# Allegro board 200-128343-0000_03.brd
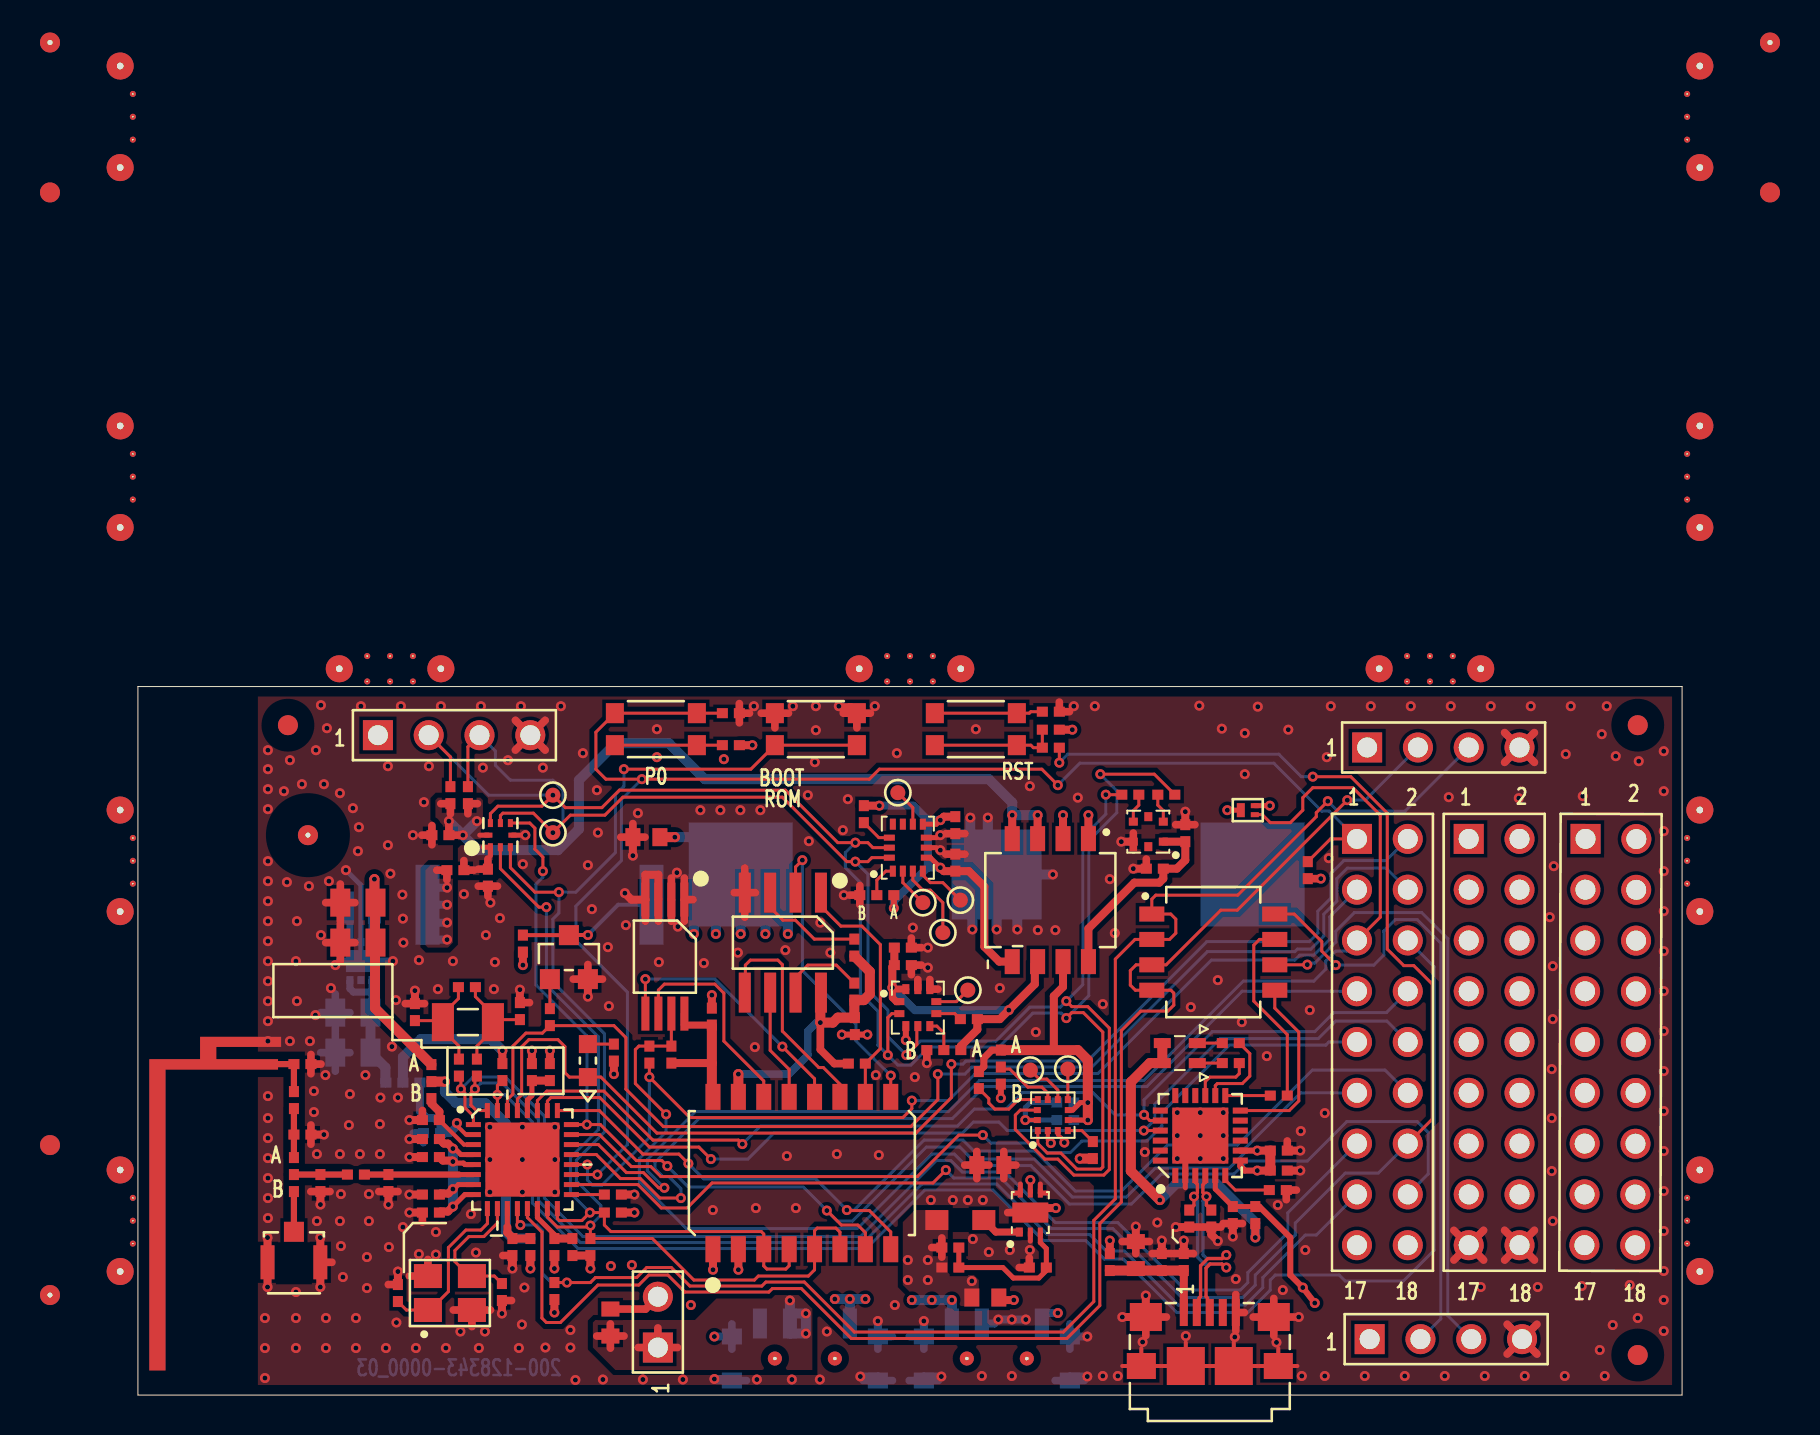
[diagram p0: board, top side]
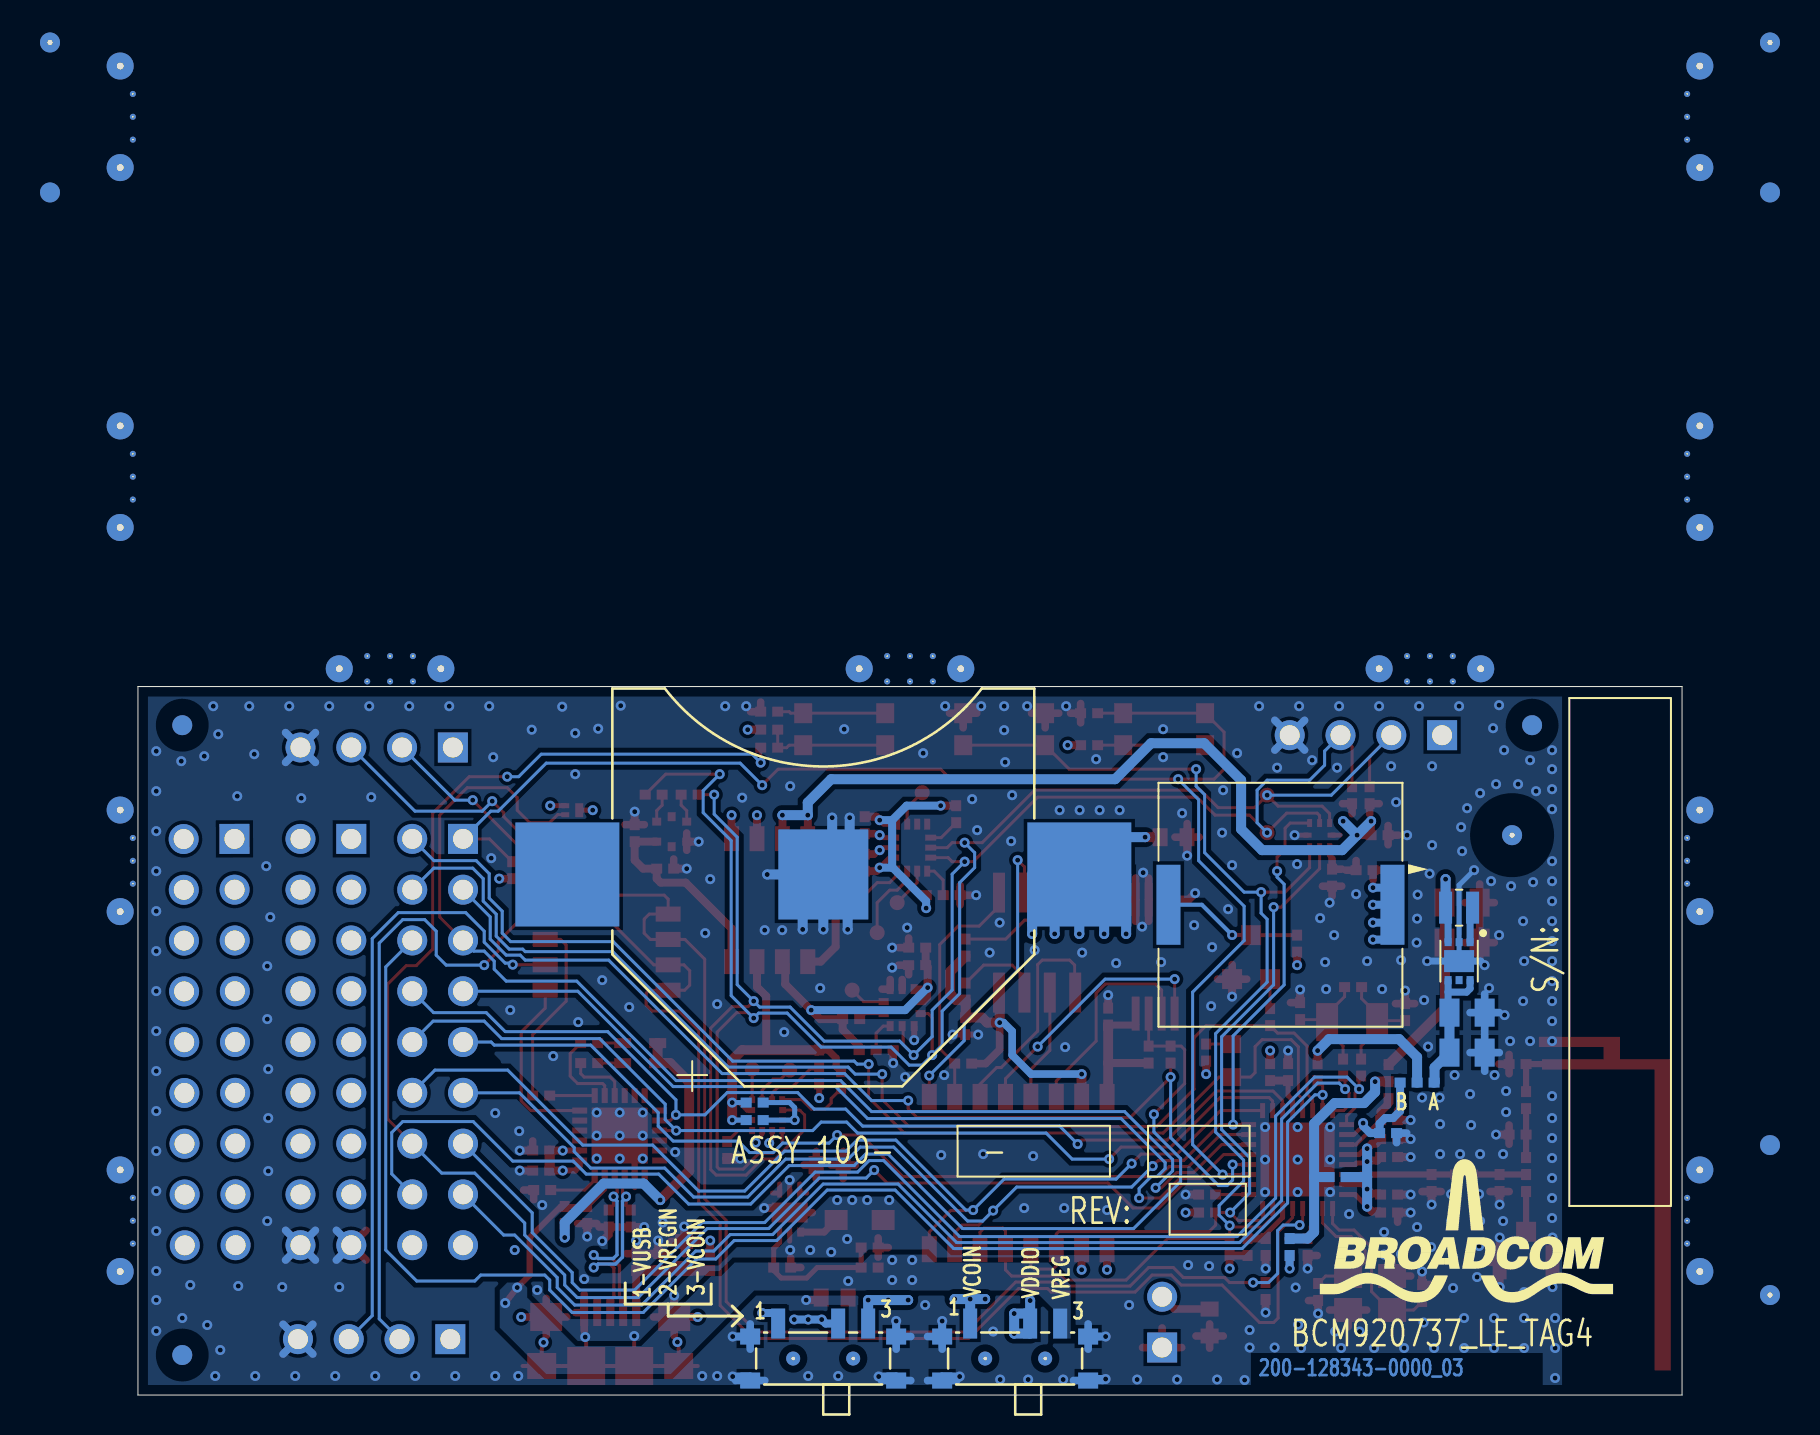
[diagram p1: board, bottom side, seen from below]

Outline 77.22 x 35.43 mm; copper layers: TOP, L02_GND, L03_PWR, BOTTOM. Coordinates in mm from the lower left corner of the outline.
Outline path: 0,35.43 0,0 77.22,0 77.22,35.43 0,35.43

## Design rules (mm)
net group DP_90_1: nets USB_DN USB_DP

## Placement (name value [footprint] x y rotation side)
A1  INV_F_ANTENNA  [TRACE]  99.88 -70.32 0 top
C1  4.7uF  [CAPC1608_IS0603Q]  25.43 27.9 180 top
C2  0.1uF  [CAPC1005_IS0402Q]  19.7 16.15 90 top
C3  0.1uF  [CAPC1005_IS0402Q]  20.82 7.4 270 top
C4  0.1uF  [CAPC1005_IS0402Q]  18.73 7.4 270 top
C5  0.1uF  [CAPC1005_IS0402Q]  28.7 18.93 90 top
C6  47uF  [CAPC2012_IS0805Q]  10.75 19.12 180 bottom
C7  47uF  [CAPC2012_IS0805Q]  11 22.62 180 top
C8  2.2uF  [CAPC1005_IS0402Q]  14.7 13.1 180 bottom
C9  1uF  [CAPC1005_IS0402Q]  14.65 13.75 180 top
C10  0.01uF  [CAPC1005_IS0402Q]  14.65 12.8 180 top
C11  10pF  [CAPC1005_IS0402Q]  14.65 11.9 180 top
C12  0.01uF  [CAPC1005_IS0402Q]  14.65 10.02 180 top
C13  0.01uF  [CAPC1005_IS0402Q]  14.65 9.12 180 top
C14  1.8pF  [CAPC1005_IS0402Q]  9.12 10.6 270 top
C15  1.8pF  [CAPC1005_IS0402Q]  12.53 10.6 270 top
C16  1.8pF (DNI)  [CAPC1005_IS0402Q]  8.22 16.55 0 top
C17  1.8pF (DNI)  [CAPC1005_IS0402Q]  8.22 13.03 0 top
C18  15pF  [CAPC1005_IS0402Q]  13 5.1 90 top
C19  15pF  [CAPC1005_IS0402Q]  18.2 5.15 270 top
C20  12pF  [CAPC1005_IS0402Q]  13.85 19.15 90 top
C21  12pF  [CAPC1005_IS0402Q]  19.1 19.2 90 top
C22  150pF  [CAPC1005_IS0402Q]  40.62 6.38 0 top
C23  4.7uF  [CAPC1608_IS0603Q]  42.62 11.5 180 top
C24  10uF  [CAPC1608_IS0603Q]  42.38 4.88 0 top
C25  10uF  [CAPC1005_IS0402Q]  57 10.25 180 top
C26  0.1uF  [CAPC1005_IS0402Q]  54.75 9 90 top
C28  4.7uF  [CAPC1608_IS0603Q]  49.9 7 90 top
C29  0.1uF  [CAPC1005_IS0402Q]  51.2 6.65 270 top
C30  22uF  [CAPC2012_IS0805Q]  10.75 17.12 180 bottom
C31  22uF  [CAPC2012_IS0805Q]  11 24.62 180 top
C34  10uF  [CAPC1005_IS0402Q]  52.38 28.1 90 top
C37  0.1uF  [CAPC1005_IS0402Q]  50.85 26.32 180 top
C54  0.1uF  [CAPC1005_IS0402Q]  57.05 12.22 180 top
C58  0.1uF  [CAPC1005_IS0402Q]  35.85 18.45 270 top
C59  0.1uF  [CAPC1005_IS0402Q]  38.25 21.5 0 top
C60  4.7uF  [CAPC1005_IS0402Q]  38.25 22.38 0 top
C61  0.1uF  [CAPC1005_IS0402Q]  40.88 26.62 90 top
C62  0.1uF  [CAPC1005_IS0402Q]  40.88 28.5 270 top
C63  0.1uF  [CAPC1005_IS0402Q]  47.75 12.25 270 top
C64  0.1uF  [CAPC1005_IS0402Q]  46.38 13.75 180 bottom
C66  1uF  [CAPC1005_IS0402Q]  46.38 14.62 180 bottom
C68  0.1uF  [CAPC1005_IS0402Q]  15.12 28 180 top
C69  0.1uF  [CAPC1005_IS0402Q]  17.5 25.88 270 top
D1  LTST-C190CKT  [LEDC1608Q]  22.5 16.73 180 top
D3  APTB1615SURKCGKC-F01  [LEDS4_KING_APTB1615Q]  52.1 17.1 180 top
D4  10V  [FUSC1005_IS0402Q]  52.3 6.65 270 top
D5  10V  [FUSC1005_IS0402Q]  53.67 8.82 90 top
D6  10V  [FUSC1005_IS0402Q]  52.58 8.82 90 top
D7  10V  [FUSC1005_IS0402Q]  57.05 11.23 0 top
FB1  120Ohms  [INDC1005_IS0402Q]  19.62 7.4 90 bottom
FB2  120Ohms  [INDC1005_IS0402Q]  17.23 10.9 180 bottom
FB3  600Ohms  [INDC1005_IS0402Q]  48.6 6.65 270 top
J1  20279-001E-04  [IPX_20279-001E-01]  7.8 6.64 270 top
J2  PBC04SAAN  [CTST254PSS4]  61.59 2.79 0 top
J7  1981568-1  [TYCO_1981568-1]  53.6 1.45 0 top
J8  PBC04SAAN  [CTST254PSS4]  61.47 32.38 0 top
J9  PBC04SAAN  [CTST254PSS4]  12 33 0 top
J10  S-M-.100-2X9  [CTST254PDS18]  60.96 27.81 270 top
J11  S-M-.100-2X9 (DNI)  [CTST254PDS18]  66.55 27.81 270 top
J12  PBC02SAAN  [CTST254PSS2]  26 2.38 90 top
J13  S-M-.100-2X9 (DNI)  [CTST254PDS18]  72.39 27.81 269.8 top
L1  10uH  [INDS2_TDK_VLS201610CXQ]  11.15 24.38 0 bottom
L2  4.7uH  [INDS2_MUR_LQM21NQ]  41.12 8.75 270 top
LS1  PKLCS1212E4001-R1  [SPKRS2_MUR_PKLCS1212Q]  20.08 24.52 0 bottom
NOREF  -  [unnamed]  64.61 35.43 180 top
NOREF#2  -  [#2]  -4.4 67.64 0 top
NOREF#3  -  [#2]  8.5 228 0 top
NOREF#4  -  [unnamed#3]  77.22 8.72 90 top
NOREF#5  -  [#2]  -9.4 72.64 0 top
NOREF#6  -  [#2]  10.75 8 0 top
NOREF#7  -  [unnamed#4]  7.5 33.5 0 top
NOREF#8  -  [unnamed#3]  0 63.93 270 top
NOREF#9  -  [unnamed]  12.61 35.43 180 top
NOREF#10  -  [unnamed#2]  -4.4 5 0 top
NOREF#11  -  [#2]  -4.4 67.64 0 top
NOREF#12  -  [#2]  -4.4 5 90 top
NOREF#13  -  [unnamed#4]  -4.4 60.14 0 top
NOREF#14  -  [#2]  -4.4 67.64 0 top
NOREF#15  -  [#2]  78.5 27 0 top
NOREF#16  -  [unnamed#4]  75 2 0 top
NOREF#17  -  [#2]  -4.4 67.64 0 top
NOREF#18  -  [#2]  101.6 96.39 0 top
NOREF#19  -  [#2]  -191.5 228 0 top
NOREF#20  -  [#2]  77.22 35.43 0 top
NOREF#21  -  [#2]  0 37.21 90 top
NOREF#22  -  [#2]  8.5 28 0 top
NOREF#23  -  [unnamed#4]  75 33.5 0 top
NOREF#24  -  [#2]  -4.4 67.64 90 top
NOREF#25  -  [unnamed]  38.61 35.43 180 top
NOREF#26  -  [unnamed#4]  -4.4 67.64 0 top
NOREF#27  -  [unnamed#2]  81.61 67.64 180 top
NOREF#28  -  [unnamed#3]  0 8.72 270 top
NOREF#29  -  [unnamed#4]  8.5 28 0 top
NOREF#30  -  [#2]  0 35.43 0 top
NOREF#31  -  [#2]  -335.28 -208.41 0 top
NOREF#32  -  [#2]  -9.4 0 90 top
NOREF#33  -  [unnamed#3]  0 45.93 270 top
NOREF#34  -  [unnamed#3]  0 26.72 270 top
NOREF#35  -  [#2]  0 0 0 top
NOREF#36  -  [unnamed#3]  77.22 63.93 90 top
NOREF#37  -  [#2]  -22.5 -25.5 0 top
NOREF#38  -  [#2]  83.82 58.29 0 top
NOREF#39  -  [unnamed#4]  81.61 60.14 180 top
NOREF#40  -  [unnamed#3]  77.22 26.72 90 top
NOREF#41  -  [#2]  8.5 28 0 top
NOREF#42  -  [#2]  0 35.43 0 top
NOREF#43  -  [#2]  65.5 37 0 top
NOREF#44  -  [#2]  363.22 -129.67 0 top
NOREF#45  -  [unnamed#3]  77.22 45.93 90 top
NOREF#46  -  [unnamed#4]  -4.4 12.5 0 top
NOREF#47  -  [#2]  0 35.43 90 top
NOREF#48  -  [unnamed#4]  -4.4 12.5 180 bottom
NOREF#49  -  [unnamed#4]  -4.4 60.14 180 bottom
NOREF#50  -  [unnamed#4]  81.61 60.14 0 bottom
NOREF#51  -  [unnamed#4]  75 33.5 180 bottom
NOREF#52  -  [#2]  363.22 -129.67 180 bottom
NOREF#53  -  [unnamed#4]  75 2 180 bottom
NOREF#54  -  [unnamed#4]  7.5 33.5 180 bottom
Q1  2SC2712-Y,LF  [SOT23_B_E_C]  21.55 21.9 0 top
Q3  PBSS3540M  [SOT883_SC-101_B_E_C]  55.5 29.25 180 top
R1  10K  [RESC1005_IS0402Q]  45.65 33.27 180 top
R2  0  [RESC1005_IS0402Q]  45.65 32.38 0 top
R3  0  [RESC1005_IS0402Q]  20.6 16.15 270 top
R4  0  [RESC1005_IS0402Q]  21.73 7.4 90 top
R5  0  [RESC1005_IS0402Q]  19.62 7.4 90 top
R6  1K  [RESC1005_IS0402Q]  45.65 34.17 0 top
R7  1K  [RESC1005_IS0402Q]  29.65 32.5 180 top
R8  10K  [RESC1005_IS0402Q]  26.68 17.02 90 top
R9  0  [RESC1005_IS0402Q]  25.57 17.02 90 top
R10  100K  [RESC1005_IS0402Q]  29.65 34.1 0 top
R11  470  [RESC1005_IS0402Q]  19.25 22.57 90 top
R12  10K (DNI)  [RESC1005_IS0402Q]  20.82 5.2 270 top
R13  0  [RESC1005_IS0402Q]  18.23 16.15 270 top
R14  5.6K  [RESC1005_IS0402Q]  20.6 18.9 270 top
R15  10K  [RESC1005_IS0402Q]  35.83 20.18 90 top
R16  10K  [RESC1005_IS0402Q]  35.83 22.38 90 top
R17  10K  [RESC1005_IS0402Q]  35.95 16.57 0 top
R18  4.7K  [RESC1005_IS0402Q]  23.75 9.12 180 top
R19  4.7K  [RESC1005_IS0402Q]  22.62 7.4 90 top
R22  200  [RESC1005_IS0402Q]  23.8 17.12 90 top
R23  10K  [RESC1005_IS0402Q]  23.75 10.02 0 top
R24  2.7nH  [INDC1005_IS0402Q]  10.9 11.02 0 top
R25  0  [RESC1005_IS0402Q]  7.8 14.75 270 top
R26  0 (DNI)  [RESC1005_IS0402Q]  16.05 16.38 90 top
R27  0 (DNI)  [RESC1005_IS0402Q]  16.95 16.38 270 top
R28  10M  [RESC1005_IS0402Q]  16.45 20.4 0 top
R29  0  [RESC1608_IS0603Q]  23.62 3.62 90 top
R30  10K  [RESC1005_IS0402Q_OPT_AB]  40.3 17.25 180 top
R31  10K  [RESC1005_IS0402Q_OPT_AB]  36.95 25 180 top
R32  10K  [RESC1005_IS0402Q_OPT_AB]  43.15 16.4 270 top
R39  0  [RESC1005_IS0402Q]  15.88 26.25 0 top
R40  4.7K  [RESC1005_IS0402Q]  15.62 30 270 top
R41  4.7K  [RESC1005_IS0402Q]  16.5 30 270 top
R50  0  [RESC1005_IS0402Q]  51.42 30.02 180 top
R51  0  [RESC1005_IS0402Q]  49.62 30.02 0 top
R59  0  [RESC1005_IS0402Q]  57.05 14.97 0 top
R60  200 (DNI)  [RESC1005_IS0402Q]  54.65 17.6 180 top
R61  200 (DNI)  [RESC1005_IS0402Q]  54.65 16.6 180 top
R62  0 (DNI)  [RESC1005_IS0402Q]  55.88 9 270 top
R63  10K  [RESC1005_IS0402Q]  41.55 18.8 0 top
R64  10K  [RESC1005_IS0402Q]  36.3 29.05 270 top
R65  10K  [RESC1005_IS0402Q]  42.05 15.75 90 top
R66  10K (DNI)  [RESC1005_IS0402Q]  58.5 26.25 90 top
RD5  0  [RESC1005_IS0402Q_OPT_AB]  14.68 15.68 270 top
RD6  0  [RESC1005_IS0402Q_OPT_AB]  13.25 15.62 0 bottom
RD7  0  [RESC1005_IS0402Q_OPT_AB]  7.8 11.02 270 top
RFB1  360K  [RESC1005_IS0402Q]  40.62 7.38 0 top
RFB2  240K  [RESC1005_IS0402Q]  45 6.38 180 top
SW1  KMR221GLFS  [SWPBS4_CK_KMR2XXG]  33.9 33.3 0 top
SW2  KMR221GLFS  [SWPBS4_CK_KMR2XXG]  25.9 33.3 0 top
SW3  KMR221GLFS  [SWPBS4_CK_KMR2XXG]  41.9 33.3 0 top
SW4  SSSS811101  [SWSLS3_ALPS_SSSS811101]  42.95 1.82 90 bottom
SW5  SSSS811101  [SWSLS3_ALPS_SSSS811101]  33.35 1.82 90 bottom
SW6  A6H-4101  [SWDPS8_OMRON_A6H-4102]  53.77 22.15 0 top
SW8  TDA08H0SB1  [SWDPS16_ITT_TDA08H0SK1]  33.2 11.1 90 top
SW9  A6H-4101  [SWDPS8_OMRON_A6H-4102]  45.62 24.75 270 top
TP5  TP-SMT-030-RND  [TP_SMD_030RD]  20.75 30 180 top
TP6  TP-SMT-030-RND  [TP_SMD_030RD]  20.75 28.12 180 top
TP7  TP-SMT-030-RND  [TP_SMD_030RD]  41.12 24.75 0 top
TP8  TP-SMT-030-RND  [TP_SMD_030RD]  38 30.12 0 top
TP9  TP-SMT-030-RND  [TP_SMD_030RD]  41.5 20.25 0 top
TP11  TP-SMT-030-RND  [TP_SMD_030RD]  39.25 24.62 0 top
TP12  TP-SMT-030-RND  [TP_SMD_030RD]  40.25 23.12 0 top
TP13  TP-SMT-030-RND  [TP_SMD_030RD]  44.62 16.25 0 top
TP14  TP-SMT-030-RND  [TP_SMD_030RD]  46.5 16.3 90 top
U1  24FC512-I/ST  [TSOP65P640_8_D300N]  26.35 21.93 270 top
U2  BCM20737A1KML2G  [QFN50P500X500_32_HS370_BCM]  19.23 11.77 0 top
U3  MX25U4033EM1I-12G  [SOIC127P600_8_D490N]  32.25 22.62 270 top
U4  XC9265B1214R-G  [SON55P200X180_6_USP-6ELQ]  11.15 21.7 270 bottom
U5  XC9236_ADJ  [SON50P200X180_6_USP-6CQ]  44.62 9.12 90 top
U6  CP2105-F01-GM  [QFN50P400X400_24_HS280N]  53.12 12.97 90 top
U8  HTS221  [MODS6_ST_HLGA-6LN]  50.52 28.18 180 top
U9  FXM2IC102  [QFN50P160X160_8_MAC08AQ]  18.12 28 90 top
U10  LPS25HBTR  [QFN60P250X250_10_ST-LGA-10LN]  39 19.38 0 top
U15  LSM6DS3  [LGA50P300X250_14_ST-LGA14N]  38.5 27.38 90 top
U16  LIS3MDLTR  [QFN50P200X200_12_ST_LGA-12Q]  45.75 14 90 top
Y1  24.000MHz  [XTALS4_3M2X2M5]  15.6 5.1 90 top
Y2  0.03277MHz  [XTALS2_ABR_ABS07Q]  16.5 18.65 0 top
ZB1  3002TR  [BATHS3_KEY_3002Q]  42.94 26.04 180 bottom

## Library data of the parts
A1 = INV_F_ANTENNA_1: Tolerance: TOLERANCE; User Part Number: PART NUMBER
C1-C26 C28-C31 C34 C37 C54 C58-C64 C66 C68 C69 = CAP: User Part Number: Part No
D1 = DIO-LED: User Part Number: Part No
D3 = LED-DUAL-RED1-GRN2: User Part Number: Part No
D4-D7 = DIO-TVS-BIPOLAR-2: User Part Number: Part No
FB1-FB3 = FB: User Part Number: Part No
J1 = RF-2GND-J: User Part Number: Part No
J2 J8 J9 = PLG-4-J: User Part Number: Part No
J7 = USB-5P-6SH-J: User Part Number: Part No
J10 J11 J13 = PLG-18-ODD-EVEN-J: Tolerance: TOLERANCE; User Part Number: PART NUMBER
J12 = HDR1X2-J: User Part Number: Part No
L1 = IND-SHIELDED-NO-DOT: User Part Number: Part No
L2 = IND: User Part Number: Part No
LS1 = SPEAKER: User Part Number: Part No
NOREF NOREF#9 NOREF#25 = -: User Part Number: MOUSEBITE_BD2BD_70MIL-3HOLE
NOREF#4 NOREF#8 NOREF#28 NOREF#33 NOREF#34 NOREF#36 NOREF#40 NOREF#45 = -: User Part Number: MOUSEBITE_BD2RAIL_70MIL-3HOLE
NOREF#10 NOREF#26 NOREF#27 NOREF#29 = -: User Part Number: MTGHOLE_D320N
Q1 = NPN: User Part Number: Part No
Q3 = PNP: User Part Number: Part No
R1-R19 R22 R23 R25-R29 R39-R41 R50 R51 R59-R66 RFB1 RFB2 = RES: User Part Number: Part No
R24 = IND-DOT-1: User Part Number: Part No
R30 R32 RD5 RD6 = RES-OPT-B-A: User Part Number: Part No
R31 RD7 = RES-OPT-A-B: User Part Number: Part No
SW1-SW3 = SWITCH-PB-13-24: User Part Number: Part No
SW4 SW5 = SWITCH-SPDT-CP2NC3NO1-4SHLD: User Part Number: Part No
SW6 SW9 = SW-DIP-4: User Part Number: Part No
SW8 = SW-DIP-8: User Part Number: Part No
TP5-TP9 TP11-TP14 = TP: User Part Number: Part No
U1 = 24XX512-DIL8: Tolerance: TOLERANCE; User Part Number: PART NUMBER
U2 = BCM20736A1KML2G-W1000-27301: User Part Number: Part No
U3 = MX25U4033E-DIL8: User Part Number: Part No
U4 = XC9265-DFN6H: User Part Number: Part No
U5 = XC9236-ADJ-DFN6H: User Part Number: Part No
U6 = USB-CP2105-QFN24H: User Part Number: Part No
U8 = HTS221-LGA6: User Part Number: Part No
U9 = VOLT-XLATOR-FXM2IC102: User Part Number: Part No
U10 = LPS25HB-LGA10: User Part Number: Part No
U15 = LSM6DS3-LGA14: User Part Number: Part No
U16 = LIS3MDL-LGA12: User Part Number: Part No
Y1 = XTAL-1G3G: User Part Number: Part No
Y2 = XTAL: User Part Number: Part No
ZB1 = BATTERY-HOLDER-P2N1: User Part Number: Part No

## Footprints (pads in the part's own frame, mm; a bottom-side part is the same pattern mirrored in y, then rotated)
BATHS3_KEY_3002Q
  rect 4.5x4.5 smd: N(0,0)
  rect 5.2x5.2 smd: P1(-12.8,0) P2(12.8,0)
CAPC1005_IS0402Q
  rect 0.55x0.5 smd: 1(-0.425,0) 2(0.425,0)
CAPC1608_IS0603Q
  rect 0.75x0.9 smd: 1(-0.675,0) 2(0.675,0)
CAPC2012_IS0805Q
  rect 1x1.4 smd: 1(-0.88,0) 2(0.88,0)
CTST254PDS18
  rect 1.5x1.5 hole 1: 1(0,0)
  round 1.5 hole 1: 2(0,2.54) 3(2.54,0) 4(2.54,2.54) 5(5.08,0) 6(5.08,2.54) 7(7.62,0) 8(7.62,2.54) 9(10.16,0) 10(10.16,2.54) 11(12.7,0) 12(12.7,2.54) 13(15.24,0) 14(15.24,2.54) 15(17.78,0) 16(17.78,2.54) 17(20.32,0) 18(20.32,2.54)
CTST254PSS2
  rect 1.5x1.5 hole 1: 1(0,0)
  round 1.5 hole 1: 2(2.54,0)
CTST254PSS4
  rect 1.5x1.5 hole 1: 1(0,0)
  round 1.5 hole 1: 2(2.54,0) 3(5.08,0) 4(7.62,0)
FUSC1005_IS0402Q
  rect 0.55x0.5 smd: 1(-0.425,0) 2(0.425,0)
INDC1005_IS0402Q
  rect 0.55x0.5 smd: 1(-0.425,0) 2(0.425,0)
INDS2_MUR_LQM21NQ
  rect 1x1.15 smd: 1(0,1.175) 2(0,-1.175)
INDS2_TDK_VLS201610CXQ
  rect 0.65x1.6 smd: 1(-0.675,0) 2(0.675,0)
IPX_20279-001E-01
  rect 1.7x0.7 smd: G1(0,1.32) G2(0,-1.32)
  rect 1x1 smd: S(-1.525,0)
LEDC1608Q
  rect 0.9x0.9 smd: A(0,-0.826) C(0,0.826)
LEDS4_KING_APTB1615Q
  rect 0.85x0.5 smd: A1(0.875,0.5) A2(0.875,-0.5) C1(-0.875,0.5) C2(-0.875,-0.5)
LGA50P300X250_14_ST-LGA14N
  rect 0.55x0.3 smd: 1(-1.175,0.75) 2(-1.175,0.25) 3(-1.175,-0.25) 4(-1.175,-0.75) 8(1.175,-0.75) 9(1.175,-0.25) 10(1.175,0.25) 11(1.175,0.75)
  rect 0.3x0.55 smd: 5(-0.5,-0.925) 6(0,-0.925) 7(0.5,-0.925) 12(0.5,0.925) 13(0,0.925) 14(-0.5,0.925)
MODS6_ST_HLGA-6LN
  rect 0.45x0.4 smd: 1(-0.75,0.5) 2(-0.75,-0.5) 4(0.75,-0.5) 5(0.75,0.5)
  rect 0.4x0.45 smd: 3(0,-0.75) 6(0,0.75)
QFN50P160X160_8_MAC08AQ
  rect 0.4x0.25 smd: 1(-0.605,0.5) 2(-0.605,0) 3(-0.605,-0.5) 5(0.605,-0.5) 6(0.605,0) 7(0.605,0.5)
  rect 0.25x0.4 smd: 4(0,-0.6) 8(0,0.6)
QFN50P200X200_12_ST_LGA-12Q
  rect 0.35x0.3 smd: 1(-0.775,0.75) 2(-0.775,0.25) 3(-0.775,-0.25) 4(-0.775,-0.75) 7(0.775,-0.75) 8(0.775,-0.25) 9(0.775,0.25) 10(0.775,0.75)
  rect 0.3x0.35 smd: 5(-0.25,-0.775) 6(0.25,-0.775) 11(0.25,0.775) 12(-0.25,0.775)
QFN50P400X400_24_HS280N
  rect 0.75x0.3 smd: 1(-2,1.25) 2(-2,0.75) 3(-2,0.25) 4(-2,-0.25) 5(-2,-0.75) 6(-2,-1.25) 13(2,-1.25) 14(2,-0.75) 15(2,-0.25) 16(2,0.25) 17(2,0.75) 18(2,1.25)
  rect 0.3x0.75 smd: 7(-1.25,-2) 8(-0.75,-2) 9(-0.25,-2) 10(0.25,-2) 11(0.75,-2) 12(1.25,-2) 19(1.25,2) 20(0.75,2) 21(0.25,2) 22(-0.25,2) 23(-0.75,2) 24(-1.25,2)
  rect 2.8x2.8 smd: H(0,0)
QFN50P500X500_32_HS370_BCM
  rect 0.75x0.25 smd: 1(-2.45,1.75) 2(-2.45,1.25) 3(-2.45,0.75) 4(-2.45,0.25) 5(-2.45,-0.25) 6(-2.45,-0.75) 7(-2.45,-1.25) 8(-2.45,-1.75) 17(2.45,-1.75) 18(2.45,-1.25) 19(2.45,-0.75) 20(2.45,-0.25) 21(2.45,0.25) 22(2.45,0.75) 23(2.45,1.25) 24(2.45,1.75)
  rect 0.25x0.75 smd: 9(-1.75,-2.45) 10(-1.25,-2.45) 11(-0.75,-2.45) 12(-0.25,-2.45) 13(0.25,-2.45) 14(0.75,-2.45) 15(1.25,-2.45) 16(1.75,-2.45) 25(1.75,2.45) 26(1.25,2.45) 27(0.75,2.45) 28(0.25,2.45) 29(-0.25,2.45) 30(-0.75,2.45) 31(-1.25,2.45) 32(-1.75,2.45)
  rect 3.7x3.7 smd: H(0,0)
QFN60P250X250_10_ST-LGA-10LN
  rect 0.5x0.35 smd: 1(-0.925,0.3) 2(-0.925,-0.3) 6(0.925,-0.3) 7(0.925,0.3)
  rect 0.35x0.5 smd: 3(-0.6,-0.925) 4(0,-0.925) 5(0.6,-0.925) 8(0.6,0.925) 9(0,0.925) 10(-0.6,0.925)
RESC1005_IS0402Q
  rect 0.55x0.5 smd: 1(-0.425,0) 2(0.425,0)
RESC1005_IS0402Q_OPT_AB
  rect 0.55x0.5 smd: A(-0.85,0) B(0.85,0) C(0,0)
RESC1608_IS0603Q
  rect 0.75x0.9 smd: 1(-0.675,0) 2(0.675,0)
SOIC127P600_8_D490N
  rect 2x0.6 smd: 1(-2.5,1.905) 2(-2.5,0.635) 3(-2.5,-0.635) 4(-2.5,-1.905) 5(2.5,-1.905) 6(2.5,-0.635) 7(2.5,0.635) 8(2.5,1.905)
SON50P200X180_6_USP-6CQ
  rect 0.45x0.35 smd: 1(-0.975,0.55)
  rect 0.45x0.25 smd: 2(-0.975,0) 3(-0.975,-0.5) 4(0.975,-0.5) 5(0.975,0) 6(0.975,0.5)
  rect 1x1.8 smd: H(0,0)
SON55P200X180_6_USP-6ELQ
  rect 0.4x0.35 smd: 1(-0.95,0.55) 2(-0.95,0) 3(-0.95,-0.55) 4(0.95,-0.55) 5(0.95,0) 6(0.95,0.55)
  rect 1.1x1.5 smd: H(0,0)
SOT23_B_E_C
  rect 1x1 smd: B(-0.95,-1.1) C(0,1.1) E(0.95,-1.1)
SOT883_SC-101_B_E_C
  rect 0.4x0.25 smd: B(-0.35,0.225) E(-0.35,-0.225)
  rect 0.4x0.7 smd: C(0.35,0)
SPKRS2_MUR_PKLCS1212Q
  rect 1.2x4 smd: 1(-5.6,0) 2(5.6,0)
SWDPS8_OMRON_A6H-4102
  rect 1.25x0.75 smd: 1(-3.075,1.905) 2(-3.075,0.635) 3(-3.075,-0.635) 4(-3.075,-1.905) 5(3.075,-1.905) 6(3.075,-0.635) 7(3.075,0.635) 8(3.075,1.905)
SWDPS16_ITT_TDA08H0SK1
  rect 1.3x0.75 smd: 1(-3.81,4.445) 2(-3.81,3.175) 3(-3.81,1.905) 4(-3.81,0.635) 5(-3.81,-0.635) 6(-3.81,-1.905) 7(-3.81,-3.175) 8(-3.81,-4.445) 9(3.81,-4.445) 10(3.81,-3.175) 11(3.81,-1.905) 12(3.81,-0.635) 13(3.81,0.635) 14(3.81,1.905) 15(3.81,3.175) 16(3.81,4.445)
SWPBS4_CK_KMR2XXG
  rect 0.9x1 smd: 1(2.05,0.8) 2(2.05,-0.8) 3(-2.05,0.8) 4(-2.05,-0.8)
SWSLS3_ALPS_SSSS811101
  custom 0.7x0.175 hole 0.9 unplated: (0,-1.5) (0,1.5)
  rect 1.5x0.7 smd: 1(1.75,2.25) 2(1.75,-0.75) 3(1.75,-2.25)
  rect 0.8x1 smd: SH1(1.1,3.65) SH2(1.1,-3.65) SH3(-1.1,3.65) SH4(-1.1,-3.65)
TP_SMD_030RD
  round 0.75 smd: 1(0,0)
TRACE
  round 0.25 smd: 1(-93.091,86.868) 2(-92.091,86.868)
TSOP65P640_8_D300N
  rect 1.7x0.4 smd: 1(-2.85,0.975) 2(-2.85,0.325) 3(-2.85,-0.325) 4(-2.85,-0.975) 5(2.85,-0.975) 6(2.85,-0.325) 7(2.85,0.325) 8(2.85,0.975)
TYCO_1981568-1
  rect 0.4x1.35 smd: 1(-1.3,2.675) 2(-0.65,2.675) 3(0,2.675) 4(0.65,2.675) 5(1.3,2.675)
  rect 1.6x1.4 smd: SH1(-3.2,2.45) SH2(3.2,2.45)
  rect 1.45x1.3 smd: SH3(-3.425,0) SH4(3.425,0)
  rect 1.9x1.9 smd: SH5(-1.2,0) SH6(1.2,0)
unnamed
  custom 1.35x0.337 hole 1.8 unplated: (-2.54,-0.889) (2.54,-0.889)
  custom 0.3x0.075 hole 0.5 unplated: (-1.143,-0.254) (-1.143,-1.524) (0,-0.254) (0,-1.524) (1.143,-0.254) (1.143,-1.524)
unnamed#3
  custom 1.35x0.337 hole 1.8 unplated: (-2.54,-0.889) (2.54,-0.889)
  custom 0.3x0.075 hole 0.5 unplated: (-1.143,-0.254) (0,-0.254) (1.143,-0.254)
unnamed#4
  round 1 smd: (0,0)
unnamed#2
  custom 1x0.25 hole 3.2 unplated: (0,0)
XTALS2_ABR_ABS07Q
  rect 1.1x1.9 smd: 1(-1.25,0) 2(1.25,0)
XTALS4_3M2X2M5
  rect 1.2x1.4 smd: 1(-0.85,1.1) 2(-0.85,-1.1) 3(0.85,-1.1) 4(0.85,1.1)

## Nets
5V_USB: C54.2 D7.1 FB3.1 J10.17 J10.18 SW4.1(NO) U6.7(REGIN) U6.8(VBUS)
GND: A1.1(FEED) A1.2(GND) C1.2 C2.2 C3.2 C4.2 C5.2 C6.2 C7.2 C8.2 C9.2 C10.2 C11.2 C12.2 C13.2 C14.2 C15.2 C16.1 C16.2 C17.2 C18.2 C19.2 C20.2 C21.2 C23.2 C24.2 C25.1 C26.1 C28.2 C29.1 C30.2 C31.2 C34.2 C37.2 C54.1 C58.2 C59.2 C60.2 C61.2 C62.2 C63.2 C64.2 C66.2 C68.2 C69.2 D4.1 D5.1 D6.1 D7.2 J1.G1(GND#G1) J1.G2(GND#G2) J2.4(N4) J7.5(GND) J7.SH1(SHIELD#SH1) J7.SH2(SHIELD#SH2) J7.SH3(SHIELD#SH3) J7.SH4(SHIELD#SH4) J7.SH5(SHIELD#SH5) J7.SH6(SHIELD#SH6) J8.4(N4) J9.4(N4) J11.17 J11.18 Q1.E R6.2 R10.2 R12.2 R23.2 R25.1 R30.B R31.B R32.B RFB2.2 SW1.1 SW1.3 SW4.SH1(MTG1) SW4.SH2(MTG2) SW4.SH3(MTG3) SW4.SH4(MTG4) SW5.SH1(MTG1) SW5.SH2(MTG2) SW5.SH3(MTG3) SW5.SH4(MTG4) U1.1(A0) U1.2(A1) U1.3(A2) U1.4(GND) U2.H(VSS) U3.4(GND) U4.2(GND) U4.H(HS-GND) U5.2(VSS#2) U5.5(VSS#5) U5.H(HS-VSS) U6.2(GND) U6.H(HS-GND) U8.5(GND) U9.4(GND) U10.3(RESVD_GND) U10.8(GND#8) U10.9(GND#9) U15.6(GND1) U15.7(GND2) U16.2(RESVD_GND#2) U16.3(GND) U16.12(RESVD_GND#12) Y1.2(GND#2) Y1.4(GND#4) ZB1.N
VDD_COMBO: C61.1 C62.1 R31.A R64.1 SW9.5(B4) U15.5(VDD_IO) U15.8(VDD)
VDD_HT: C34.1 C37.1 SW9.8(B1) U8.1(VDD)
VDD_MAG: C64.1 C66.1 R32.A R65.2 SW9.7(B2) U16.5(VDD) U16.6(VDD_IO)
VDD_PR: C59.1 C60.1 R30.A R63.2 SW9.6(B3) U10.1(VDD_IO) U10.10(VDD)
VDD_SENS: C68.1 Q3.C R40.2 R41.2 SW9.1(A1) SW9.2(A2) SW9.3(A3) SW9.4(A4) U9.8(VCCB)
VDDI2C: C69.1 R39.2 U9.1(VCCA)
VDDIO: J2.1(N1) J8.1(N1) J9.1(N1) J11.1 J11.2 J12.2 LS1.1 Q3.E R1.1 R3.1 R4.1 R7.1 R11.1 R13.1 R18.1 R19.1 R22.1 R29.2 R39.1 R66.1 RD6.C SW8.1(A1) SW8.2(A2)
VDDIO_EE: C5.1 R8.1 SW8.16(B1) U1.8(VCC)
VDDIO_SF: C58.1 R15.1 R16.1 R17.1 SW8.15(B2) U3.8(VCC)
1P2VC: FB1.1 R5.1
1P2VRF: C10.1 C11.1 C12.1 C13.1 FB2.2 U2.4(VDDIF) U2.5(VDDFE) U2.7(VDDVCO) U2.8(VDDPLL)
BCM_RX: J8.3(N3) R12.1 SW6.1(A1) SW6.2(A2) U2.12(UART_RXD)
BCM_TX: J8.2(N2) SW6.3(A3) SW6.4(A4) U2.13(UART_TXD)
CE: R17.2 SW8.10(B7) U3.1(CS_L)
EXT_LDO_IN: C6.1 C30.1 RD6.A U4.4(CE) U4.6(VIN)
LDOEXT: C7.1 C31.1 L1.2 RD5.A U4.3(VOUT)
LDOINT: C9.1 RD5.B U2.3(LDOOUT)
MISO: SW8.9(B8) U3.2(SO/SIO1)
P0: J10.1 R10.1 R66.2 SW2.1 SW2.3 U2.19(P0)
P1: J10.3 R9.1 U2.20(P1)
P2: J10.5 Q3.B U2.22(P2)
P3: J10.7 U2.21(P3)
P4: J10.9 U2.23(P4)
P8/P33: J10.11 SW8.7(A7) U2.24(P8/P33) U9.5(OE)
P11/P27: J10.13 R26.1 U2.1(XTALI32K/P11/P27)
P12/P26: J10.15 R27.2 U2.32(XTALO32K/P12/P26)
P13/P28: D1.C(CATHODE) J10.2 U2.29(P13/P28)
P14/P38: J10.4 R14.2 U2.30(P14/P38)
P15: J10.6 R13.2 U2.31(P15)
P24: J10.8 U2.27(P24) U6.20(RXD_SCI)
P25: J10.10 U2.26(P25) U6.21(TXD_SCI)
P32: J10.12 SW8.8(A8) U2.25(P32)
REG_IN: C23.1 SW4.2(COM) U5.4(CE/MODE) U5.6(VIN)
RESET_N: J10.14 R2.2 U2.18(RESET_L)
SCK: SW8.13(B4) U3.6(SCLK)
SCL: J9.2(N2) R40.1 R50.1 TP5.1(TP) U9.7(B0) U10.2(SCL/SPC) U15.13(SCL) U16.1(SCL/SPC)
SCL_EE: SW8.14(B3) U1.6(SCL)
SCL_SCK: R18.2 SW8.3(A3) SW8.4(A4) U2.16(SCL) U9.2(A0)
SDA: J9.3(N3) R41.1 R51.1 TP6.1(TP) U9.6(B1) U10.4(SDA/SDI/SDO) U15.14(SDA) U16.11(SDA/SDI/SDO)
SDA_EE: SW8.12(B5) U1.5(SDA)
SDA_SI: R19.2 SW1.2 SW1.4 SW8.5(A5) SW8.6(A6) U2.15(SDA) U9.3(A1)
SI: SW8.11(B6) U3.5(SI/SIO0)
SWDCK: J2.3(N3) SW6.6(B3)
SWDIO: J2.2(N2) SW6.8(B1)
UP_RX: R59.2 SW6.7(B2)
UP_TX: SW6.5(B4) U6.12(RXD_ECI)
USB_DN: D5.2 J7.2(DM) U6.4(D_N)
USB_DP: D6.2 J7.3(DP) U6.3(D_P)
VCOIN: C1.1 SW4.3(NC) SW5.1(NO) ZB1.P2
VREG: C22.1 C24.1 C26.2 L2.2 R62.1 RFB1.1 SW5.3(NC) U6.5(VIO)
WP: J10.16 R8.2 R9.2 U1.7(WP)
N17010314: C19.1 U2.10(XTALO) Y1.3
N17010533: C14.1 R24.1 RD7.C
N17010535: C15.1 R24.2 U2.6(RF)
N17396120: C18.1 U2.9(XTALI) Y1.1
N17594109: C8.1 RD6.B U2.2(LDOIN)
N17687697: C17.1 R25.2 RD7.A
N17807795: LS1.2 Q1.C R11.2
N17819688: C20.1 R26.2 R28.1 Y2.1
N17819692: C21.1 R27.1 R28.2 Y2.2
N17856759: C2.1 R3.2 U2.28(VDDO)
N17856781: C3.1 R4.2 U2.14(VDDM)
N17856809: C4.1 R5.2 U2.11(VDDC)
N17857031: R7.2 SW2.2 SW2.4
N17857033: R23.1 U2.17(TMC)
N17866760: R1.2 R2.1 SW3.2 SW3.4
N17873060: FB1.2 FB2.1 RD5.C
N17920960: C22.2 RFB1.2 RFB2.1 U5.3(FB)
N17920962: L2.1 U5.1(LX)
N17955658: J1.S(RF_IN) RD7.B
N18004658: C28.1 C29.2 D4.2 FB3.2 J7.1(VBUS)
N18008391: R6.1 SW3.1 SW3.3
N18014200: J12.1 R29.1 SW5.2(COM)
N18034018: R50.2 U8.2(SCL)
N18034022: R51.2 U8.4(SDA)
N18058355: R60.1 U6.14(GPIO1_ECI_L/DSR_ECI)
N18058357: D3.C1(RED_CATHODE) R61.2
N18058361: D3.C2(GREEN_CATHODE) R60.2
N18058402: C25.2 U6.6(VDD)
N18058453: R59.1 U6.13(TXD_ECI)
N18058528: D3.A1(RED_ANODE) D3.A2(GREEN_ANODE) R62.2
N18058566: R61.1 U6.15(GPIO0_ECI_L/DTR_ECI)
N18071408: R16.2 U3.3(WP_L/SIO2)
N18071410: R15.2 U3.7(HOLD_L/SIO3)
N18076364: TP9.1(TP) U10.7(INT/DRDY)
N18076477: R63.1 U10.6(CS)
N18078153: R64.2 U15.12(CS)
N18078806: R65.1 U16.10(CS)
N18078950: TP13.1(TP) U16.8(DRDY)
N18078953: TP14.1(TP) U16.7(INT)
N18079098: C63.1 U16.4(C1)
N18105849: R30.C U10.5(SDO/SA0)
N18106184: R31.C U15.1(SDO/SA0)
N18107149: R32.C U16.9(SDO/SA1)
N178073830: Q1.B R14.1
N178074131: D1.A(ANODE) R22.2
N180008151: L1.1 U4.1(LX)
N180751066: TP7.1(TP) U15.4(INT1)
N180751067: TP12.1(TP) U15.3(SCX)
N180751068: TP11.1(TP) U15.2(SDX)
N180751069: TP8.1(TP) U15.9(INT2)

Pads without a net: J7 4; J11 3 4 5 6 7 8 9 10 11 12 13 14 15 16; J13 1 2 3 4 5 6 7 8 9 10 11 12 13 14 15 16 17 18; U4 5; U6 1 9 10 11 16 17 18 19 22 23 24; U8 3 6; U15 10 11; ZB1 P1

## Via types
v1: diameter 0.5, hole 0.25, TOP to BOTTOM, 510 vias

## Routing (per net, layer and track width the routed paths; a pad name or vN(x,y) marks a point on that pad's centre or on a via; arc(x,y) is an arc through that point)
5V_USB: length 14.8
  TOP w0.3: U6.7 55.12,11.45 55.35,11.23 v1(55.98,11.23) ; U6.8 v1(55.98,12.22)
  TOP w0.4: C54.2 v1(55.98,12.22) ; D7.1 v1(55.98,11.23) ; FB3.1 v1(48.6,7.73)
  TOP w0.5: D7.1 C54.2
  L03_PWR w0.381: 62.76,6.75 J10.18 ; J10.18 62.76,8.24 ; J10.18 64.24,6.75 ; J10.18 64.24,8.24 ; J10.17 61.7,8.24 ; J10.17 61.7,6.75 ; J10.17 60.22,6.75 ; J10.17 60.22,8.24
  BOTTOM w0.4: SW4.1 45.2,4.1 v1(46,4.1)
GND: length 252
  TOP w0.2: J7.SH5 52.4,2.63 ; J7.SH5 51.22,1.45 ; J7.SH5 53.58,1.45 ; J7.SH3 50.17,2.33 ; J7.SH3 51.13,1.45 ; J7.SH3 49.22,1.45 ; J7.SH6 55.98,1.45 ; J7.SH6 54.8,2.63 ; J7.SH6 53.62,1.45 ; J7.SH4 57.98,1.45 ; J7.SH4 56.07,1.45 ; J7.SH4 57.02,2.33 ; v1(46.33,12.62) 46.33,12.7 46,13.03 U16.3 ; U16.2 45.5,12.75 v1(45.65,12.6) ; U16.12 v1(44.38,13.75)
  TOP w0.25: U5.5 v1(44.62,10.75) ; 44.62,7.69 U5.2 ; 39.42,27.38 39.93,27.38 ; 52.38,10.37 U6.2 ; U9.4 19.16,28 ; 39.42,27.88 39.93,27.88
  TOP w0.3: v1(35.2,18.02) C58.2 v1(36.48,18.02) ; v1(38.4,17.75) U10.3 ; U6.2 52.38,11.82 v1(51.98,11.82) ; R32.B v1(43.15,14.85)
  TOP w0.31: A1.1 A1.2 C16.1 R25.1
  TOP w0.381: C1.2 25.36,27.9 ; C1.2 24.75,28.58 ; C1.2 24.14,27.9 ; 14.33,19.57 C20.2 13.37,19.57 ; 57.48,12.22 57.48,12.71 ; 17.02,25.45 C69.2 ; C69.2 17.98,25.45 ; C69.2 17.5,24.94 ; J8.4 69.83,33.13 ; J8.4 68.34,31.64 ; J8.4 69.83,31.64 ; J8.4 68.34,33.13 ; 39.18,22.38 C60.2 38.67,22.86 ; 27.32,24.77 27.32,25.86 ; 27.32,24.77 27.32,23.69 ; 27.32,24.77 27.76,24.77 ; 56.8,2.97 J7.SH2 ; J7.SH2 57.83,3.9 ; J7.SH2 56.8,4.83 ; J7.SH2 55.77,3.9 ; 30.07,33.62 R10.2 ; R10.2 30.58,34.1 ; R10.2 30.07,34.58 ; 39.6,20.78 U10.8 40.01,20.3 ; 68.34,6.75 J11.18 ; J11.18 69.83,6.75 ; J11.18 68.34,8.24 ; J11.18 69.83,8.24 ; 53.19,8.4 D5.1 54.16,8.4 ; C16.2 8.65,17.03 ; C16.2 8.65,16.07 ; C16.2 9.16,16.55 ; C31.2 10.85,24.62 ; C31.2 9.39,24.62 ; C31.2 10.12,23.69 ; C31.2 10.12,25.56 ; 40.39,27.05 C61.2 41.36,27.05 ; 51.89,28.52 C34.2 52.86,28.52 ; 13.57,5.95 Y1.4 14.5,6.78 ; 51.68,7.07 C29.1 50.72,7.07 ; 8.65,12.54 C17.2 8.65,13.51 ; 54.27,8.57 C26.1 55.23,8.57 ; 14.22,13.75 14.22,14.23 ; 14.7,27.52 C68.2 ; C68.2 14.19,28 ; C68.2 14.7,28.48 ; J9.4 20.36,32.26 ; J9.4 18.88,32.26 ; J9.4 20.36,33.74 ; J9.4 18.88,33.74 ; 26.02,23.69 26.02,24.77 ; 9.61,10.18 C14.2 8.64,10.18 ; 35.27,34.1 SW1.1 ; SW1.1 36.63,34.1 ; SW1.1 35.95,33.37 ; U3.4 30.88,25.12 ; U3.4 29.81,25.12 ; U3.4 30.34,26.36 ; U3.4 30.34,23.89 ; 65.8,8.24 J11.17 ; J11.17 67.29,6.75 ; J11.17 65.8,6.75 ; J11.17 67.29,8.24 ; C23.2 41.95,12.18 ; C23.2 41.95,10.82 ; C23.2 42.56,11.5 ; C23.2 41.34,11.5 ; C21.2 19.58,19.62 ; 49.9,7.07 C28.2 ; C28.2 49.22,7.68 ; C28.2 50.58,7.68 ; 51.82,7.07 D4.1 52.78,7.07 ; 10.12,21.69 C7.2 ; C7.2 10.12,23.56 ; C7.2 9.39,22.62 ; C7.2 10.85,22.62 ; J7.5 55.33,4.12 ; J7.5 54.9,5.03 ; J7.5 54.9,3.22 ; J1.G1 9.7,6.64 ; 40.39,28.07 C62.2 41.36,28.07 ; 46.08,34.66 46.08,34.17 46.58,34.17 ; 31.17,34.1 SW1.3 ; SW1.3 32.53,34.1 ; SW1.3 31.85,33.37 ; 12.52,5.52 13,5.52 ; Q1.E 23.23,20.8 ; Q1.E 22.5,21.53 ; Q1.E 21.77,20.8 ; 51.43,3.9 J7.SH1 50.4,2.97 ; 38.67,21.02 C59.2 39.18,21.5 ; 18.24,6.98 18.73,6.98 ; 15.77,4.25 Y1.2 ; Y1.2 16.7,3.42 ; Y1.2 17.63,4.25 ; 12.04,10.18 C15.2 13.01,10.18 ; 50.42,26.32 50.42,26.81 ; 49.77,27.24 U8.5 49.77,28.11 ; 35.59,25 R31.B ; R31.B 36.1,25.48 ; R31.B 36.1,24.52 ; C19.2 18.68,4.73 ; 57.42,9.77 C25.1 57.93,10.25 ; 68.47,3.54 69.22,2.79 ; 69.22,2.79 69.96,3.54 ; 69.22,2.79 69.96,2.05 ; 69.22,2.79 68.47,2.05 ; 25.38,23.69 U1.4 ; 39.45,16.77 R30.B ; D6.1 53.06,8.4 ; 26.68,25.86 U1.2 26.68,23.69 ; 44.07,6.38 RFB2.2 44.58,6.86 ; U10.9 39,20.78 ; 43.49,9.12 U5.H ; 14.22,8.64 14.22,9.12
  TOP w0.4: Q1.E v1(22.5,19.93) ; C24.2 43.17,4.75 v1(43.8,4.75) ; v1(6.48,5.4) J1.G2 v1(6.48,7.88) ; C21.2 v1(19.1,20.27) ; 20.82,6.98 v1(20.82,6.32) ; C1.2 v1(24.75,26.98) ; C20.2 v1(13.85,20.23) ; v1(35.05,34.45) 35.1,34.4 35.65,34.4 SW1.1 ; C29.1 v1(51.2,7.73) ; v1(49.23,3.9) J7.SH1 v1(50.4,4.98) ; v1(45.9,9.35) 44.85,9.35 U5.H ; C15.2 v1(12.53,9.52) ; v1(9.12,5.4) J1.G1 v1(9.12,7.88) ; U8.5 v1(49.17,27.68) ; 57.48,11.23 v1(58.12,11.23) ; 14.22,13.75 v1(13.57,13.75) ; D5.1 53.67,8.02 v1(54,7.7) ; C17.2 v1(9.3,13.03) ; C2.2 v1(19.7,17.23) ; D4.1 v1(52.3,7.73) ; 50.42,26.32 v1(49.77,26.32) ; C14.2 v1(9.12,9.52) ; C19.2 v1(18.2,4.07) ; 14.22,9.12 v1(13.57,9.12) ; 14.22,10.02 v1(13.57,10.02) ; C34.2 v1(52.38,29.18) ; 57.48,12.22 v1(58.12,12.22) ; C26.1 v1(54.75,7.93) ; 14.22,12.8 v1(13.57,12.8) ; R12.2 v1(20.82,4.12) ; R23.2 v1(24.82,10.02) ; 26.02,24.77 26.02,26.02 25.38,26.02 U1.4 24.68,24.77 v1(24.35,25.1) ; 13,5.52 v1(13,6.18) ; C28.2 v1(49.9,8.43) ; 14.22,11.9 v1(13.57,11.9) ; D6.1 v1(51.9,8.4) ; C5.2 v1(28.7,20)
  TOP w0.45: 18.73,6.98 v1(18.73,6.32)
  TOP w0.5: v1(47.1,11.82) C63.2
  L02_GND w0.381: 65.8,8.24 J11.17 ; J11.17 67.29,8.24 ; J11.17 67.29,6.75 ; J11.17 65.8,6.75 ; 68.47,3.54 69.22,2.79 ; 69.22,2.79 69.96,3.54 ; 69.22,2.79 69.96,2.05 ; 69.22,2.79 68.47,2.05 ; 18.88,32.26 J9.4 ; J9.4 20.36,32.26 ; J9.4 18.88,33.74 ; J9.4 20.36,33.74 ; J8.4 69.83,31.64 ; J8.4 68.34,33.13 ; J8.4 68.34,31.64 ; J8.4 69.83,33.13 ; 68.34,6.75 J11.18 ; J11.18 69.83,6.75 ; J11.18 68.34,8.24 ; J11.18 69.83,8.24
  BOTTOM w0.25: C66.2 44.62,14.62 44.38,14.38 v1(44.38,13.75) C64.2 ; U4.H U4.2 11.15,25.5 v1(10.4,26.25)
  BOTTOM w0.35: v1(9.88,21.5) 10.07,21.7 U4.H v1(12.75,21.7)
  BOTTOM w0.381: 68.34,31.64 J8.4 ; J8.4 69.83,33.13 ; J8.4 69.83,31.64 ; J8.4 68.34,33.13 ; 9.87,16.19 C30.2 ; C30.2 9.87,18.06 ; C30.2 10.6,17.12 ; C30.2 9.14,17.12 ; 37.73,2.93 SW5.SH1 37,2.29 ; 40.03,0.73 SW4.SH4 38.57,0.73 ; J11.18 69.83,6.75 ; J11.18 68.34,6.75 ; J11.18 68.34,8.24 ; J11.18 69.83,8.24 ; 36.27,0.73 SW5.SH3 37.73,0.73 ; 69.22,2.79 69.96,2.05 ; 69.22,2.79 68.47,2.05 ; 69.22,2.79 69.96,3.54 ; 69.22,2.79 68.47,3.54 ; 29.7,2.29 SW5.SH2 29.7,3.56 ; 18.88,32.26 J9.4 ; J9.4 20.36,33.74 ; J9.4 18.88,33.74 ; J9.4 20.36,32.26 ; 13.77,13.1 C8.2 14.28,12.62 ; 38.57,2.93 SW4.SH2 39.3,2.29 ; 28.97,0.73 SW5.SH4 30.43,0.73 ; 46.6,3.56 SW4.SH1 46.6,2.29 ; 9.14,19.12 C6.2 ; C6.2 9.87,18.19 ; C6.2 10.6,19.12 ; C6.2 9.87,20.06 ; 67.29,8.24 J11.17 67.29,6.75 ; 47.33,0.73 SW4.SH3 45.87,0.73
  BOTTOM w0.4: v1(40.17,0.93) 39.3,0.93 SW4.SH4 ; v1(36.12,0.93) 37,0.93 SW5.SH3 ; v1(47.48,0.93) 46.6,0.93 SW4.SH3 ; SW5.SH1 v1(37,3.7) ; v1(28.82,0.8) 29.7,0.8 SW5.SH4 ; SW5.SH2 v1(28.82,2.93) ; SW4.SH1 v1(47.48,2.93) ; SW4.SH2 v1(39.3,3.7)
  BOTTOM w0.5: ZB1.N 41.62,27.35 v1(41.62,28.88) ; ZB1.N v1(42.94,23.29) ; ZB1.N 43,26.09 43,27.25 42.5,27.75 v1(42.5,28.88) ; ZB1.N 43.98,26.04 ; ZB1.N 41.73,26.04 v1(41.73,23.29) ; v1(43.98,23.29) 43.98,26.04 ; 43.98,26.04 43.98,26.03 v1(45.75,26.03)
  vias: v1(6.35,3.85) v1(6.35,2.35) v1(6.35,0.85) v1(6.5,32.25) v1(6.5,31.3) v1(6.5,30.3) v1(6.5,29.3) v1(6.5,26.7) v1(6.5,25.7) v1(6.5,24.7) v1(6.5,23.7) v1(6.5,22.7) v1(6.5,21.7) v1(6.5,20.7) v1(6.5,19.7) v1(6.5,18.7) v1(6.5,17.7) v1(6.5,14.95) v1(6.5,13.85) v1(6.5,12.85) v1(6.5,11.85) v1(6.5,10.85) v1(6.5,9.85) v1(6.5,8.85) v1(7.3,30.2) v1(7.45,25.65) v1(7.6,31.75) v1(7.6,17.7) v1(7.95,23.7) v1(7.9,21.7) v1(7.95,19.7) v1(7.9,5.15) v1(7.9,3.85) v1(7.9,2.35) v1(8.2,30.55) v1(8.55,25.45) v1(8.6,17.7) v1(8.8,15.2) v1(8.8,14.15) v1(8.9,32.25) v1(8.88,19) v1(8.95,12.05) v1(8.95,8.7) v1(9.15,34.5) v1(9.15,23) v1(9.3,30.55) v1(9.45,33.35) v1(9.38,16) v1(9.4,3.85) v1(9.4,2.35) v1(9.55,25.7) v1(9.65,20.35) v1(10.1,30.1) v1(10.1,12.05) v1(10.15,10.05) v1(10.1,8.7) v1(10.15,7.45) v1(10.25,5.9) v1(10.55,13.5) v1(10.6,15.05) v1(10.75,29.35) v1(10.9,3.85) v1(10.9,2.35) v1(11.05,28.4) v1(11,27.2) v1(11.15,34.45) v1(11.1,12.05) v1(11.38,16) v1(11.55,10.05) v1(11.55,8.7) v1(11.45,6.9) v1(11.45,5.35) v1(12.12,14.88) v1(12.1,13.55) v1(12.1,12.05) v1(12.4,2.35) v1(12.5,31.45) v1(12.5,27.5) v1(12.55,7.4) v1(12.62,26.07) v1(12.7,17.43) v1(12.9,19.75) v1(12.93,3.62) v1(13,14.88) v1(13.15,34.45) v1(13.22,25.02) v1(13.25,23.82) v1(13.28,22.62) v1(13.25,8.4) v1(13.75,28) v1(13.9,2.35) v1(14.05,21.75) v1(14.05,7.05) v1(14.3,29.65) v1(14.55,31.45) v1(14.9,8.15) v1(14.9,7.02) v1(15,20.3) v1(15.15,34.45) v1(15.4,2.35) v1(15.75,21.7) v1(16.12,3.18) v1(16.3,25.05) v1(16.65,9.05) v1(16.9,7.12) v1(17.05,2.35) v1(17.15,34.45) v1(17.25,31.38) v1(17.35,3.18) v1(17.4,23) v1(17.62,24.62) v1(17.6,13.4) v1(17.6,11.77) v1(17.6,10.15) v1(17.85,21.65) v1(17.8,20.3) v1(18.1,23.85) v1(18.5,31.75) v1(19.05,2.35) v1(19.15,34.45) v1(19.23,13.4) v1(19.23,11.77) v1(19.23,10.15) v1(19.2,3.52) v1(19.25,26.55) v1(19.32,5.38) v1(19.38,28) v1(20.25,31.38) v1(20.38,2.38) v1(20.85,13.4) v1(20.85,11.77) v1(20.85,10.15) v1(21.15,34.45) v1(21.62,3.25) v1(21.62,2.38) v1(21.88,0.75) v1(22.25,32.1) v1(22.5,26.5) v1(22.7,24.3) v1(22.95,30.25) v1(23,28.12) v1(23.25,0.77) v1(23.5,22.4) v1(23.55,19.45) v1(23.65,6.45) v1(24.4,23.5) v1(24.7,6.5) v1(25,29.1) v1(25.25,0.77) v1(25.95,33.3) v1(25.95,31.9) v1(26.05,21.65) v1(26.95,26.12) v1(27,23.43) v1(27.25,0.77) v1(27.65,4.5) v1(28.12,29.25) v1(28.3,21.6) v1(28.75,9.25) v1(29.12,29.25) v1(29.3,31.8) v1(30,22.12) v1(30.12,29.25) v1(30.8,34.45) v1(30.85,17.4) v1(30.9,9.35) v1(30.95,0.77) v1(31.12,29.25) v1(32.38,22.25) v1(32.45,11.95) v1(32.75,34.45) v1(32.7,0.77) v1(32.9,9.35) v1(33.5,30) v1(33.55,27.7) v1(33.9,34.45) v1(33.9,33.25) v1(33.85,31.65) v1(34.12,23.62) v1(34.1,0.77) v1(34.45,3.18) v1(34.62,22.12) v1(34.95,12.05) v1(35.25,28.25) v1(35.3,25) v1(35.5,29.8) v1(36.85,34.45) v1(36.9,16) v1(37.05,12) v1(37.95,32.1) v1(37.85,4.5) v1(38.75,23.38) v1(38.85,15.9) v1(39.45,16.6) v1(39.5,22.38) v1(39.5,21.38) v1(39.65,9.75) v1(40.12,28) v1(40.12,27.25) v1(40.75,9.75) v1(41.5,9.75) v1(41.75,7.8) v1(41.9,33.3) v1(42.2,0.95) v1(42.25,9.75) v1(42.55,7.15) v1(43.1,20.35) v1(43.6,7.25) v1(43.7,0.95) v1(44.6,30.45) v1(44.6,7.25) v1(44.9,18.15) v1(45,23.25) v1(45.88,23.25) v1(46.8,34.45) v1(47,29.88) v1(47.85,34.45) v1(48.25,19.55) v1(48.25,0.95) v1(48.6,25.8) v1(48.85,23.1) v1(49,0.95) v1(50.24,2.65) v1(50.35,12.15) v1(50.98,8.62) v1(51.98,14.12) v1(51.98,12.97) v1(52.4,2.95) v1(52.65,19.4) v1(53.08,34.48) v1(53.12,14.12) v1(53.12,12.97) v1(53.12,11.82) v1(54,20.75) v1(54.2,33.33) v1(54.27,14.12) v1(54.27,12.97) v1(54.27,11.82) v1(54.9,5.8) v1(54.85,2.9) v1(55.2,18.65) v1(55.35,33.1) v1(55.35,31.05) v1(56,34.42) v1(56.45,16.95) v1(56.94,2.63) v1(57,9.5) v1(57.25,5.25) v1(57.52,33.27) v1(58.05,3.9) v1(58.15,13.2) v1(58.2,0.95) v1(58.38,7.25) v1(58.6,19.25) v1(59.35,14.1) v1(59.35,0.95) v1(59.45,31.9) v1(59.55,26.85) v1(59.65,34.45) v1(61.35,0.95) v1(61.65,34.45) v1(63.35,0.95) v1(63.65,34.45) v1(65.35,0.95) v1(65.55,29.9) v1(65.65,34.45) v1(67.15,5.4) v1(67.35,0.95) v1(67.65,34.45) v1(69.05,29.85) v1(69.35,0.95) v1(69.65,34.45) v1(70,5.4) v1(70.6,23.9) v1(70.75,21.45) v1(70.75,18.8) v1(70.7,16.3) v1(70.7,13.85) v1(70.7,11.2) v1(70.75,8.7) v1(70.8,26.45) v1(71.4,32.05) v1(71.35,0.95) v1(71.65,34.45) v1(72.2,5.45) v1(72.25,29.95) v1(73.1,2.25) v1(73.2,33.05) v1(73.35,0.95) v1(73.45,34.45) v1(73.75,3.5) v1(73.9,31.95) v1(74.6,5.5) v1(75.05,31.7) v1(75,3.85) v1(76.3,32.2) v1(76.3,30.2) v1(76.3,28.2) v1(76.3,26.2) v1(76.3,24.2) v1(76.3,22.2) v1(76.3,20.2) v1(76.3,18.2) v1(76.3,16.2) v1(76.3,14.2) v1(76.3,12.2) v1(76.3,10.2) v1(76.3,8.2) v1(76.3,6.2) v1(76.3,4.75) v1(76.3,3.2)
VDD_COMBO: length 20.5
  TOP w0.25: v1(40.12,26.38) 39.62,26.88 U15.5 ; v1(40.12,28.75) 39.92,28.55 U15.8
  TOP w0.3: R31.A v1(37.8,24.35)
  TOP w0.4: SW9.5 43.08,21.68 42.33,22.43 42.33,25.43 41.55,26.2 C61.1 40.3,26.2 v1(40.12,26.38) ; C62.1 40.3,28.93 v1(40.12,28.75) ; R64.1 v1(37.08,29.48)
  BOTTOM w0.4: v1(37.8,24.35) 37.8,24.7 39.48,26.38 39.5,26.38 ; v1(37.08,29.48) 38.77,29.48 39.5,28.75 ; 39.5,28.75 39.5,26.38 ; 39.5,28.75 v1(40.12,28.75) ; 39.5,26.38 v1(40.12,26.38)
VDD_HT: length 10.2
  TOP w0.4: SW9.8 47.53,23.33 49.83,25.62 51.08,25.62 51.27,25.82 C37.1 51.95,26.32 52.38,26.75 C34.1 51.27,27.68
VDD_MAG: length 17.5
  TOP w0.25: U16.6 46.75,14.25 47.12,14.62 v1(47.5,14.62) ; U16.5 v1(47.5,13.75)
  TOP w0.35: R65.2 42.3,16.43 42.3,16.85 42.7,17.25 R32.A
  TOP w0.4: SW9.7 46.26,20.41 45.8,19.95 45.8,17.25
  TOP w0.5: v1(47.5,13.75) v1(47.5,14.62) 47.5,16.75 47,17.25 R32.A
  BOTTOM w0.25: C64.1 v1(47.5,13.75) ; C66.1 v1(47.5,14.62)
VDD_PR: length 16.6
  TOP w0.35: U10.1 37.92,19.68 37.73,19.88 v1(37.73,20.38) 37.8,20.3 U10.10
  TOP w0.4: C60.1 C59.1 37.73,21.4 v1(37.73,20.38) ; R30.A 41.15,17.45 41.98,18.27 41.98,18.8 43.1,18.8 v1(43.55,19.25) 44.85,20.55 44.85,21.54 SW9.6
  BOTTOM w0.4: v1(43.55,19.25) 38.85,19.25 v1(37.73,20.38)
VDD_SENS: length 45.3
  TOP w0.25: 17.09,28 U9.8 ; Q3.C v1(54.48,29.25)
  TOP w0.381: 16.06,28 C68.1 15.55,28.48 ; 16.98,29.57 R41.2 16.5,29.07 ; 15.14,29.57 R40.2 15.62,29.07
  TOP w0.4: 47.53,27.82 v1(47.53,29) ; 44.99,27.82 v1(44.99,29) ; 46.26,27.82 v1(46.26,29) ; 43.72,27.82 v1(43.72,29)
  BOTTOM w0.5: v1(15.55,28.7) v1(16.25,28) ; v1(16.25,28) v1(16.95,28.7) ; v1(16.25,28) 17,27.25 21,27.25 22.05,28.3 22.05,30.75 23.9,32.6 26.55,32.6 28.35,30.8 42.55,30.8 43.72,29.63 v1(43.72,29) v1(44.99,29)
VDDI2C: length 2.8
  TOP w0.25: 17.62,26.96 U9.1 17.27,27.39
  TOP w0.381: 16.3,26.73 R39.2 16.81,26.25 ; 17.5,26.81 C69.1 17.02,26.3
VDDIO: length 51.8
  TOP w0.25: Q3.E v1(56.6,29.48)
  TOP w0.38: J12.2 25.39,4.3 R29.2 ; R66.1 v1(59.15,25.82)
  TOP w0.381: 14.94,26.25 R39.1 15.45,25.77
  TOP w0.4: R7.1 v1(30.73,32.5) ; R3.1 v1(20.6,17.23) ; v1(22.62,6.32) 22.62,6.98 21.73,6.98 ; SW8.2 v1(30.02,6.27) ; R11.1 v1(19.25,21.5) ; R18.1 v1(24.82,9.12) ; R22.1 v1(23.8,16.05) ; SW8.1 v1(28.75,6.27) ; R13.1 v1(18.23,17.23) ; 46.08,33.27 v1(46.73,33.27)
  L03_PWR w0.381: J9.1 12.74,33.74 ; J9.1 12.74,32.26 ; J9.1 11.26,32.26 ; J9.1 11.26,33.74 ; J11.1 67.29,28.56 ; J11.1 67.29,27.07 ; J11.1 65.8,27.07 ; J11.1 65.8,28.56 ; J12.2 26.74,4.17 ; J12.2 25.26,4.17 ; J12.2 25.26,5.66 ; J12.2 26.74,5.66 ; 68.34,27.07 69.09,27.81 ; 69.09,27.81 69.83,27.07 ; 69.09,27.81 69.83,28.56 ; 69.09,27.81 68.34,28.56 ; 60.72,33.13 J8.1 ; J8.1 62.21,31.64 ; J8.1 62.21,33.13 ; J8.1 60.72,31.64 ; 60.85,3.54 J2.1 ; J2.1 60.85,2.05 ; J2.1 62.34,3.54 ; J2.1 62.34,2.05
  BOTTOM w0.4: 14.48,23.57 LS1.1 ; 14.48,23.57 14.48,22.77 v1(15.46,22.77) ; 14.48,23.57 14.53,23.62 v1(15.46,23.62) ; LS1.1 14.48,25.38 v1(15.46,25.38) ; LS1.1 v1(15.46,24.52)
  BOTTOM w0.5: RD6.C 13.25,16.9 14.15,17.8 17.65,17.8 v1(18.23,17.23)
VDDIO_EE: length 7.6
  TOP w0.35: C5.1 27.32,18.5 27.32,19.07
  TOP w0.4: R8.1 28.7,16.6
  TOP w0.5: C5.1 28.7,14.91 SW8.16
VDDIO_SF: length 17.4
  TOP w0.38: v1(34.12,18.62) 34.12,17.27 34.83,16.57 R17.1
  TOP w0.5: U3.8 34.12,20.09 v1(34.12,18.62) 34.75,18.62 35,18.88 C58.1 35.83,18.9 R15.1 36.3,19.75 36.6,20.05 36.6,21.18 R16.1 ; v1(30.02,16.05) SW8.15
  BOTTOM w0.38: v1(34.12,18.62) 33.93,18.62 33.5,18.2 33.5,17 32.55,16.05 v1(30.02,16.05)
1P2VC: length 1.3
  TOP w0.4: 19.62,6.98 v1(19.62,6.32)
  BOTTOM w0.4: 19.62,6.98 v1(19.62,6.32)
1P2VRF: length 11.8
  TOP w0.25: 16.77,12.03 16.15,12.03 15.85,12.32 v1(15.75,12.32) ; v1(15.75,9.43) 16.35,10.02 16.77,10.02 ; 16.77,10.52 16.02,10.52 15.8,10.3 v1(15.75,10.3) ; v1(15.75,11.68) 15.82,11.6 16.27,11.6 16.35,11.52 16.77,11.52
  TOP w0.4: C11.1 15.25,11.73 15.7,11.73 v1(15.75,11.68) ; v1(15.75,9.43) 15.5,9.18 15.12,9.18 C13.1 ; v1(15.75,10.3) 15.53,10.07 15.12,10.07 C12.1 ; C10.1 15.3,12.57 15.5,12.57 v1(15.75,12.32)
  BOTTOM w0.5: 15.75,10.9 v1(15.75,11.68) v1(15.75,12.32) ; 15.75,10.9 FB2.2 ; 15.75,10.9 v1(15.75,10.3) v1(15.75,9.43)
BCM_RX: length 78.5
  TOP w0.15: v1(59.5,29.7) 58.92,29.12 58.92,28.93 55,25 50.9,25 50.7,24.8 SW6.1 51.65,24.05 51.9,23.8 51.9,23.1 51.59,22.79 SW6.2 49.86,22.79 48.88,21.8 48.88,9.81 47.8,8.73 47.8,4.68 46.27,3.15 35.83,3.15 33.33,5.65 31.4,5.65 31.2,5.45 27.6,5.45 26.68,6.38 25.44,6.38 24.94,5.88 22.88,5.88 22.62,5.62 v1(21.45,5.62) R12.1 ; v1(19.12,8.5) 18.98,8.65 U2.12
  BOTTOM w0.15: J8.3 63.36,29.2 60,29.2 v1(59.5,29.7) ; v1(19.12,8.5) 19.95,8.5 20.23,8.23 20.23,6.07 20.68,5.62 v1(21.45,5.62)
BCM_TX: length 76.9
  TOP w0.15: U2.13 19.48,8.88 20.2,8.15 20.2,3.85 20.43,3.62 21.12,3.62 23,5.5 25.05,5.5 25.55,6 26.5,6 27.35,5.15 31.55,5.15 31.73,5.32 33.17,5.32 35.67,2.82 46.45,2.82 48.1,4.48 48.1,8.57 49.17,9.65 49.17,18.23 50.15,19.2 51.5,19.2 51.8,19.5 51.8,20.1 51.66,20.25 SW6.4 49.88,20.25 49.62,20.5 49.62,21.23 49.91,21.52 SW6.3 51.41,21.52 54.15,24.25 54.98,24.25 v1(60.48,29.75)
  BOTTOM w0.15: J8.2 61.37,29.75 v1(60.48,29.75)
CE: length 12.4
  TOP w0.15: SW8.10 R17.2 37.12,17.32 37.12,22.52 36.2,23.45 35.15,23.45 34.16,24.45 U3.1
EXT_LDO_IN: length 7.1
  BOTTOM w0.35: U4.4 11.7,20.15 ; 11.7,20.15 10.78,20.15 10.6,20.32 U4.6 ; 11.7,20.15 11.7,19.2 C6.1
  BOTTOM w0.5: C6.1 C30.1 12.38,16.38 12.38,15.65 RD6.A
LDOEXT: length 13.7
  TOP w0.5: v1(11.82,25.8) 11.82,24.68 C31.1 11.86,24.6 11.86,22.65 C7.1 11.86,22.6 11.86,19.34 RD5.A
  BOTTOM w0.35: U4.3 11.7,24.25 L1.2
  BOTTOM w0.5: L1.2 v1(11.82,25.8)
LDOINT: length 3.4
  TOP w0.2: 16.77,12.53 16.3,12.53 C9.1
  TOP w0.4: 14.68,14.82 14.68,14.57 15.07,14.18 C9.1
MISO: length 15.4
  TOP w0.15: SW8.9 v1(37.64,15.97) ; U3.2 32.89,26.41 v1(33.23,26.75)
  BOTTOM w0.15: v1(37.64,15.97) 35.9,17.72 35.9,18.55 33.23,21.23 v1(33.23,26.75)
P0: length 76.5
  TOP w0.15: R66.2 59.64,27.81 J10.1 ; U2.19 v1(22.98,11.02) ; R10.1 SW2.1 SW2.3 22.9,33.15 22.9,31.3 23.4,30.8 v1(25.2,30.8) 36.58,30.8 37.08,31.3 45.2,31.3 v1(46,30.5)
  BOTTOM w0.15: v1(46,30.5) 47.1,31.6 56.8,31.6 59.2,29.2 59.57,29.2 J10.1 ; v1(22.98,11.02) 24.48,12.53 24.48,20.15 21.9,22.73 21.9,24.45 24.18,26.73 24.18,29.77 v1(25.2,30.8)
P1: length 51.3
  TOP w0.15: R9.1 v1(25.57,15.9) 27.6,13.88 38.25,13.88 38.7,14.32 v1(38.7,14.72) ; U2.20 v1(22.48,11.52)
  BOTTOM w0.15: J10.3 59.6,23.91 59.6,22.8 58.8,22 58.1,22 57.85,21.75 53.67,21.75 48,16.07 41.88,16.07 40.52,14.72 v1(38.7,14.72) ; v1(22.48,11.52) 22.48,10.75 22.75,10.48 23.18,10.48 25.57,12.88 v1(25.57,15.9)
P2: length 62.4
  TOP w0.15: J10.5 62.12,23.9 62.12,29 60.75,30.38 58.75,30.38 58.25,29.88 58.25,29.25 57.62,28.62 56.62,28.62 56.23,29.02 Q3.B ; v1(26.32,10.36) 26.04,10.36 25.28,11.12 24.43,11.12 23.02,12.53 U2.22
  BOTTOM w0.15: v1(26.32,10.36) 25.48,11.21 25.48,11.77 27.88,14.18 40.52,14.18 42.08,15.72 50.3,15.72 55.27,20.7 58.8,20.7 59.4,21.3 59.4,21.7 59.9,22.2 60.43,22.2 J10.5
P3: length 47.5
  TOP w0.15: v1(27.15,9.85) 26.1,9.85 25.12,10.82 24.12,10.82 22.93,12.03 U2.21
  BOTTOM w0.15: v1(27.15,9.85) 27.15,10.32 26.55,10.93 26.25,10.93 25.85,11.32 25.85,11.62 28.05,13.82 40.73,13.82 42.33,15.43 50.45,15.43 55.22,20.19 J10.7
P4: length 44.1
  TOP w0.15: U2.23 23.07,13.03 24.68,11.43 25.65,11.43 26.15,10.93 38.98,10.93 41.05,13 v1(42.25,13)
  BOTTOM w0.15: v1(42.25,13) 42.65,12.6 44.98,12.6 45.45,12.12 46.62,12.12 47.2,12.7 50.45,12.7 51.2,13.45 51.2,14.12 54.58,17.5 59.4,17.5 59.55,17.65 J10.9
P8/P33: length 66.9
  TOP w0.15: v1(20.25,26.2) 20.25,26.9 19.85,27.3 19.85,28.35 19.59,28.61 U9.5 ; SW8.7 36.38,8.12 36,8.5 35.17,8.5 v1(34.45,9.23) ; U2.24 v1(22.45,13.53) 23.12,13.53 24.93,11.73 26.2,11.73 v1(26.48,11.45)
  BOTTOM w0.15: 60.96,15.11 58.14,15.11 55.4,12.38 55.4,12.17 54.58,11.35 50.88,11.35 49.42,9.9 46.73,9.9 44.83,11.8 41.7,11.8 41.1,12.4 39.42,12.4 35.73,8.7 34.98,8.7 v1(34.45,9.23) 33.27,10.4 27.52,10.4 v1(26.48,11.45) ; v1(20.25,26.2) 20.25,25.9 19.9,25.55 19.9,20.51 22.45,17.96 v1(22.45,13.53)
P11/P27: length 61.6
  TOP w0.15: 16.77,13.53 16.77,13.95 16.35,14.38 16.35,15.1 v1(16.15,15.3) 16.15,15.85 R26.1
  BOTTOM w0.15: v1(16.15,15.3) 16.75,15.9 18.37,15.9 20.32,13.95 20.32,9.85 22.25,7.93 36.12,7.93 39.92,11.73 40.65,11.73 41.23,11.15 43.35,11.15 45.88,8.62 49,8.62 52.38,5.25 55.12,5.25 55.5,5.63 55.5,6.12 57.5,8.12 57.5,9.11 J10.13
P12/P26: length 58.7
  TOP w0.15: R27.2 16.85,15.85 v1(16.85,15.3) 16.65,15.1 16.65,14.5 16.93,14.22 U2.32
  BOTTOM w0.15: J10.15 58.93,8 58.38,8 56.25,5.88 56.25,5.38 55.38,4.5 52.02,4.5 49.33,7.2 48.42,7.2 47.6,8.02 45.48,8.02 42.95,10.55 39.2,10.55 36.27,7.62 22.13,7.62 20.02,9.73 20.02,13.8 18.23,15.6 17.15,15.6 v1(16.85,15.3)
P13/P28: length 58.9
  TOP w0.15: v1(40.67,16.55) 40.67,14.88 38.9,13.1 25.95,13.1 23.15,15.9 D1.C 21.57,15.9 21.35,16.12 21.35,17.43 21,17.77 19.55,17.77 19.19,17.41 19.19,15.01 18.98,14.8 U2.29
  BOTTOM w0.15: 63.5,27.81 62.41,26.73 60.3,26.73 59.65,26.07 59.65,24.85 59,24.2 59,23.1 58.58,22.68 53.45,22.68 47.48,16.7 41.4,16.7 41.25,16.55 v1(40.67,16.55)
P14/P38: length 60
  TOP w0.15: v1(40,16.05) 40,14.78 38.65,13.43 26.27,13.43 24.4,15.3 24.4,17.88 23.8,18.48 R14.2 20.23,18.1 19.4,18.1 18.75,17.45 18.75,15.05 18.48,14.78 U2.30
  BOTTOM w0.15: J10.4 62.42,26.35 60.48,26.35 59.95,25.82 59.95,24.7 59.3,24.05 59.3,22.95 58.65,22.3 57.98,22.3 57.85,22.18 53.48,22.18 47.7,16.4 41.7,16.4 41.35,16.05 v1(40,16.05)
P15: length 75.6
  TOP w0.15: U2.31 v1(17.98,15.01) 17.98,15.47 R13.2
  BOTTOM w0.15: J10.6 64.83,21.41 64.83,7.25 63.27,5.7 60.38,5.7 60.08,6 56.88,6 56.62,5.75 56.62,5.25 55.5,4.12 51.95,4.12 49.27,6.8 48.33,6.8 47.4,7.73 45.27,7.73 42.75,10.25 39.35,10.25 36.42,7.32 22,7.32 19.73,9.6 19.73,13.65 18.36,15.01 v1(17.98,15.01)
P24: length 50.8
  TOP w0.15: v1(50.31,14.01) 50.6,13.72 U6.20 ; U2.27 19.98,14.72 20.45,15.2 23.3,15.2 25.75,12.75 30.02,12.75 v1(30.23,12.55)
  BOTTOM w0.15: J10.8 62.43,19.12 59.8,19.12 58.85,18.18 53.73,18.18 50.31,14.76 v1(50.31,14.01) 48.86,14.01 47.75,15.12 44.23,15.12 43.4,14.3 41.83,14.3 40.98,13.45 31.12,13.45 v1(30.23,12.55)
P25: length 49.8
  TOP w0.15: v1(28.65,11.8) 28.05,12.4 25.57,12.4 23.1,14.88 20.65,14.88 20.48,14.7 U2.26 ; U6.21 v1(50.3,13.22)
  BOTTOM w0.15: v1(28.65,11.8) 30.5,11.8 31.8,13.1 41.22,13.1 41.77,13.65 43.05,13.65 43.48,13.22 v1(50.3,13.22) 50.85,13.78 50.85,14.55 54.12,17.82 59.02,17.82 59.9,18.7 62.45,18.7 J10.10
P32: length 53.6
  TOP w0.15: U2.25 23.07,14.22 25.25,12.05 27.05,12.05 v1(27.52,11.57) ; v1(35.45,9.25) 35.48,9.23 36.58,9.23 37.64,8.16 SW8.8
  BOTTOM w0.15: v1(27.52,11.57) 28.3,10.8 33.9,10.8 v1(35.45,9.25) 35.82,9.25 39.32,12.75 41.25,12.75 41.8,12.2 44.88,12.2 46.88,10.2 49.18,10.2 51.48,12.5 54.98,12.5 58.73,16.25 62.36,16.25 63.5,15.11
REG_IN: length 5.9
  TOP w0.25: 44.12,10.56 U5.6 43.77,10.1 ; 45.48,10.1 U5.4 45.12,10.56
  TOP w0.381: C23.1 43.3,12.18 ; C23.1 43.3,10.82 ; C23.1 43.91,11.5
  BOTTOM w0.4: SW4.2 42.83,3.57 v1(43.02,3.77) v1(43.7,3.77) v1(44.4,3.77)
RESET_N: length 86.4
  TOP w0.15: v1(40.4,11.25) 39.75,10.61 28.71,10.61 27.46,9.36 26.17,9.36 25,10.52 U2.18 ; v1(58.75,30.93) 60.65,30.93 62.48,29.1 62.48,22.3 63.3,21.48 63.8,21.48 64.72,20.55 64.72,13.8 J10.14 ; 46.08,32.38 v1(46.08,31.62)
  BOTTOM w0.15: v1(58.75,30.93) 58.17,30.93 57.05,32.05 46.5,32.05 v1(46.08,31.62) ; v1(40.4,11.25) 40.8,10.85 43.15,10.85 45.67,8.32 48.75,8.32 52.2,4.88 55.25,4.88 55.88,5.5 55.88,6 57.88,8 57.88,8.6 60.38,11.1 62.03,11.1 J10.14
SCK: length 5.6
  TOP w0.15: SW8.13 32.56,16.29 31.61,17.23 U3.6
SCL: length 88.9
  TOP w0.15: v1(48.12,31.05) 50.83,31.05 R50.1 ; U15.13 36.75,27.38 36.5,27.62 v1(35.88,27.62) 35,27.62 32.38,30.25 24.07,30.25 23.2,29.38 21.38,29.38 v1(20.75,30) 20.2,29.45 18,29.45 17.62,29.07 U9.7 ; v1(37.5,17) 37.5,18.88 37.7,19.07 U10.2 ; J9.2 15.62,31.91 R40.1 ; v1(46.42,18.85) 46.7,19.12 47.27,19.12 48.25,18.15 48.25,11.4 48.15,11.3 46.95,11.3 46.15,12.1 45.48,12.1 45,12.57 U16.1
  BOTTOM w0.15: v1(20.75,30) 17.54,30 J9.2 ; v1(48.12,31.05) 48.95,30.23 48.95,29.12 47.55,27.73 47.55,19.98 v1(46.42,18.85) 46.17,19.1 44.75,19.1 43.05,17.4 39.55,17.4 38.65,16.5 38,16.5 v1(37.5,17) 37,17.5 37,19.2 36.12,20.07 36.12,25.62 35.38,26.38 35.38,27.12 v1(35.88,27.62)
SCL_EE: length 10.8
  TOP w0.15: 26.02,19.07 26.02,20.25 26.32,20.55 28.85,20.55 29.3,20.1 29.3,17.7 31.3,15.71 31.3,14.91
SCL_SCK: length 37.2
  TOP w0.15: U9.2 18.12,26.32 20.05,24.4 v1(20.43,24.4) ; U2.16 20.98,8.82 21.07,8.73 22.2,8.73 v1(22.6,9.12) R18.2 23.32,8.5 23.65,8.18 31.17,8.18 31.3,8.05 31.3,6.45 31.45,6.3 32.4,6.3 32.56,6.46 SW8.4
  BOTTOM w0.15: v1(20.43,24.4) 20.43,20.52 23.02,17.92 23.02,13.28 21.62,11.88 21.62,10.1 v1(22.6,9.12)
SDA: length 84.2
  TOP w0.15: R41.1 16.5,32.42 J9.3 ; v1(48.4,30.02) R51.1 ; v1(46.42,19.7) 46.7,19.43 47.5,19.43 48.58,18.35 48.58,11.27 48.3,11 46.8,11 46,11.8 45.35,11.8 43.88,13.28 43.88,14 44.12,14.25 U16.11 ; v1(38.42,17) 38.95,17.52 38.95,18.4 U10.4 ; U15.14 36.7,26.88 36.5,26.68 v1(35.88,26.68) 35.45,26.68 32.23,29.9 24.25,29.9 23.35,29 21.62,29 v1(20.75,28.12) 19.77,29.1 18.25,29.1 18.12,28.98 U9.6
  BOTTOM w0.15: v1(20.75,28.12) 21.25,28.62 21.25,30.25 20.75,30.75 18.62,30.75 17.88,31.5 17.88,32.2 J9.3 ; v1(48.4,30.02) 48.4,29.05 47.25,27.9 47.25,20.52 v1(46.42,19.7) 46.12,19.4 44.6,19.4 42.9,17.7 39.12,17.7 v1(38.42,17) 37.5,17.93 37.5,19.25 36.5,20.25 36.5,26.05 v1(35.88,26.68)
SDA_EE: length 13.2
  TOP w0.15: U1.5 v1(25.38,20.8) ; v1(32.22,17.43) 33.84,15.81 SW8.12
  BOTTOM w0.15: v1(32.22,17.43) 28.85,20.8 v1(25.38,20.8)
SDA_SI: length 63.2
  TOP w0.15: v1(21.05,25.15) 19.85,25.15 18.62,26.38 U9.3 ; v1(24.3,31.3) 30.65,31.3 SW1.4 SW1.2 ; U2.15 20.48,8.9 20.98,8.4 22.55,8.4 v1(22.62,8.48) R19.2 25.73,7.82 27.8,5.75 30.82,5.75 31.02,5.95 33.52,5.95 33.84,6.26 SW8.5 33.84,8.21 33.97,8.35 34.9,8.35 35.11,8.14 SW8.6
  BOTTOM w0.15: v1(22.62,8.48) 23.15,9 23.15,9.48 21.93,10.7 21.93,11.75 23.32,13.15 23.32,18.07 20.75,20.65 20.75,23.8 21.05,24.1 v1(21.05,25.15) 21.9,25.15 23.88,27.12 23.88,30.02 24.3,30.45 v1(24.3,31.3)
SI: length 11.4
  TOP w0.15: U3.5 30.38,20.16 30.38,21.5 30.62,21.75 32,21.75 32.23,21.52 32.23,18.2 34.05,16.38 34.27,16.38 35.11,15.54 SW8.11
SWDCK: length 31.1
  TOP w0.15: SW6.6 58.47,21.52 v1(58.48,21.52)
  BOTTOM w0.15: J2.3 65.5,3.97 65.5,22.82 64.2,24.12 60.83,24.12 59.9,23.2 59.9,22.65 58.85,21.6 58.55,21.6 v1(58.48,21.52)
SWDIO: length 32
  TOP w0.15: SW6.8 57.82,24.05 59.2,22.68 59.2,22.2 v1(59.9,21.5)
  BOTTOM w0.15: J2.2 65.15,3.81 65.15,22.6 63.98,23.77 62.88,23.77 62.3,23.2 62.3,22 61.8,21.5 v1(59.9,21.5)
UP_RX: length 9.4
  TOP w0.15: SW6.7 56.09,22.79 55.8,22.5 55.8,19.7 57.48,18.02 57.48,14.97
UP_TX: length 9.2
  TOP w0.15: U6.12 57.57,14.22 58.05,14.71 58.05,18.15 56.85,19.35 SW6.5
USB_DN: length 10.2
  TOP w0.165: U6.4 53.38,10.64 53.25,10.51 53.25,10.13 53.43,9.95 v1(53.43,9.93) 53.43,9.49 D5.2 ; J7.2 53.06,4.24 53.06,4.85 53.14,4.92 53.14,6.46 53.5,6.82 54.22,6.82 54.39,7 v1(54.42,7)
  BOTTOM w0.165: v1(53.43,9.93) 53.43,9.87 53.26,9.7 53.26,7.01 53.45,6.82 54.21,6.82 54.38,7 v1(54.42,7)
